# Altium PCB IBC_prijamnik_VB_ver2.PcbDoc (part 1 of 2)
Units mm, origin at the board's own origin, x right, y up, seen from the top; angles counter-clockwise.
Board outline 47.7 x 49.61 mm, 4 copper layers (Top Layer, GND 1, GND 2, Bottom Layer), stack 1.562 mm thick; 81 components, 52 nets, 253 pads, 212 vias.
Unrouted connection lines stored in the file: 60.
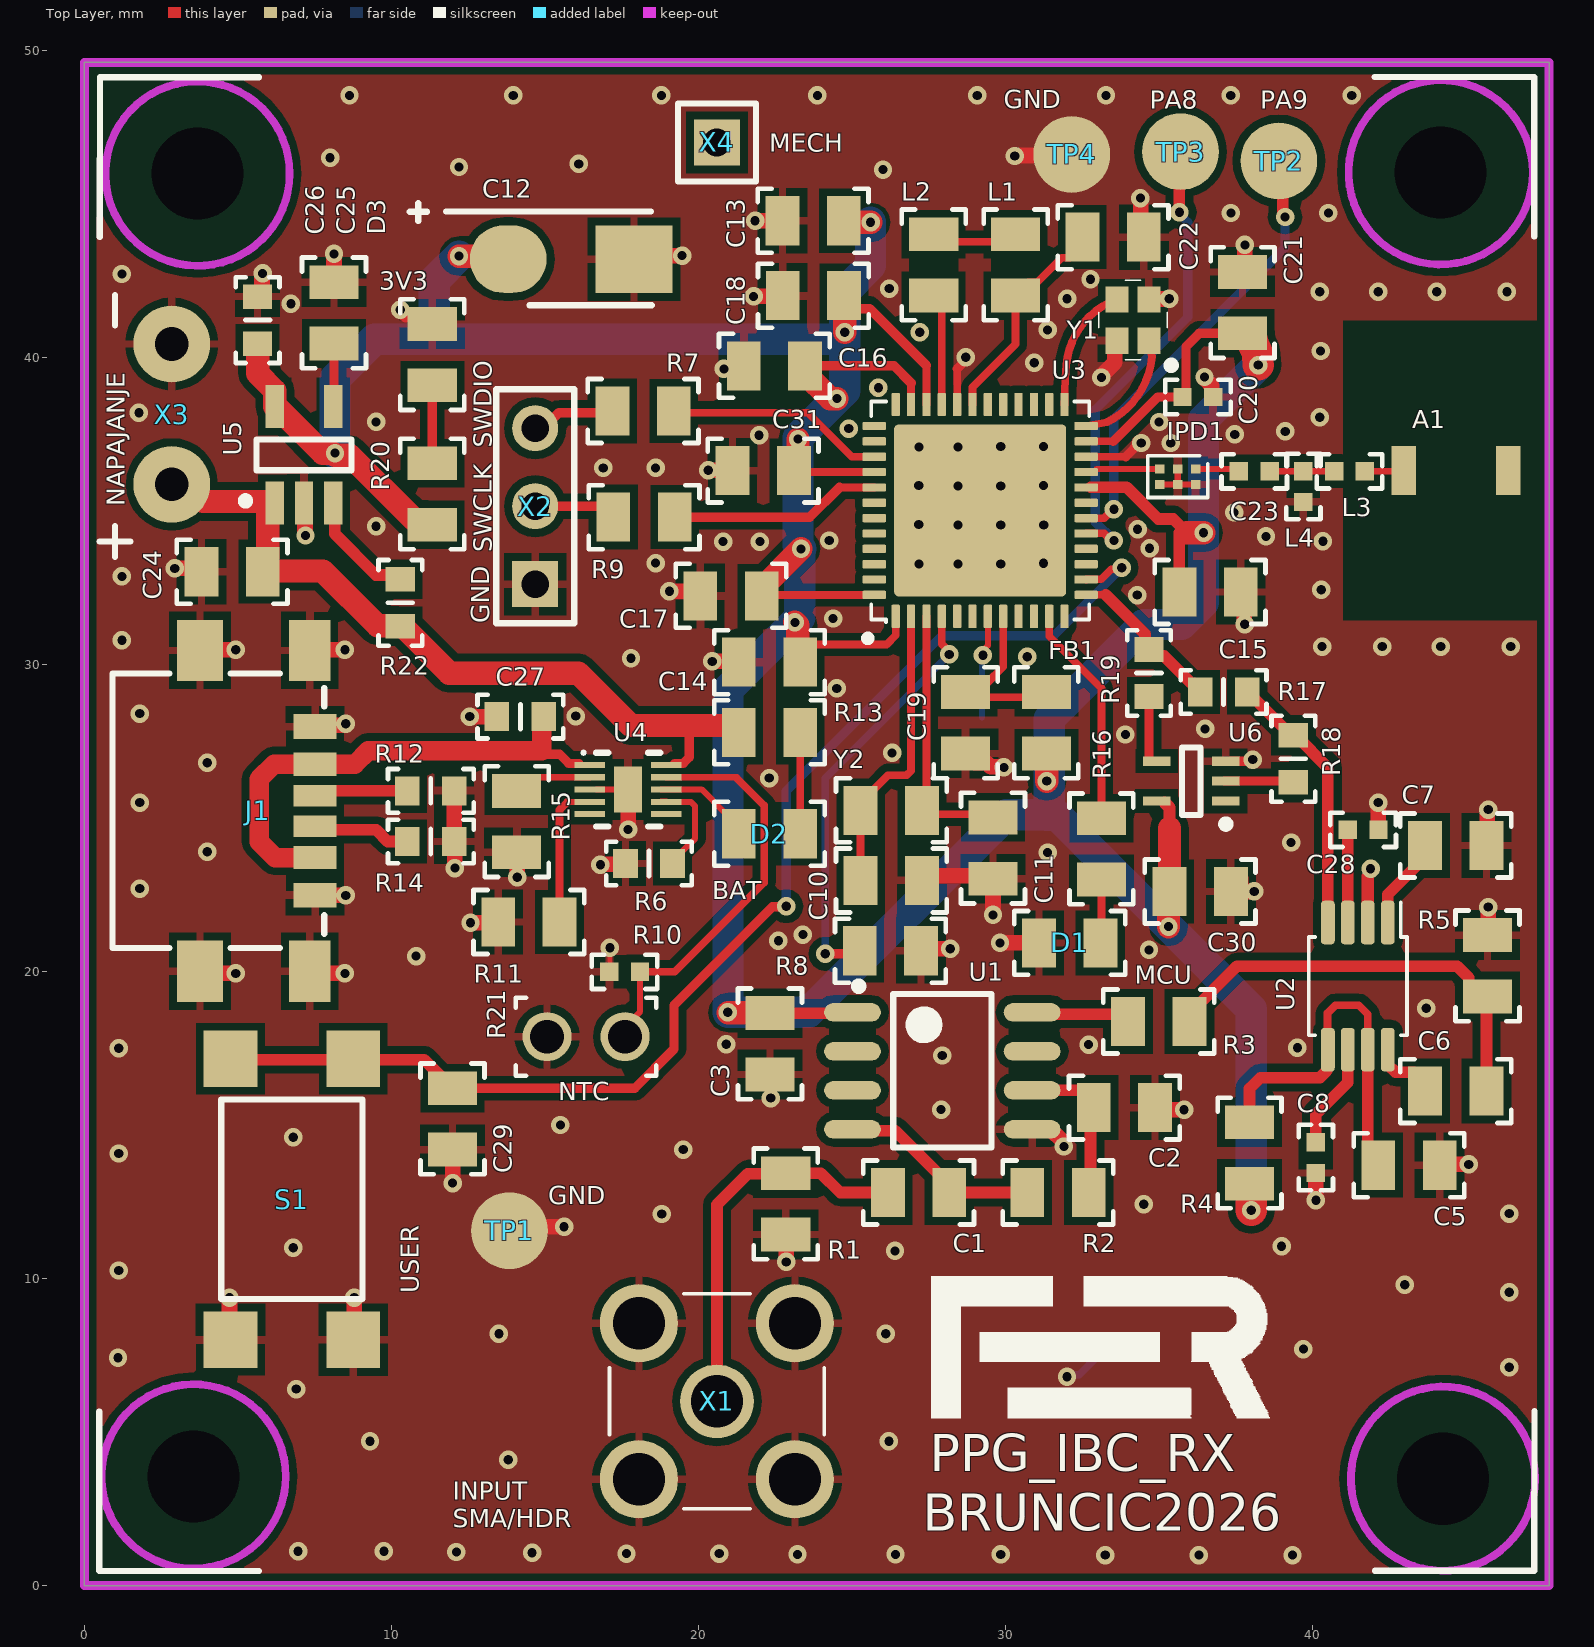
[diagram p0: Top Layer view]
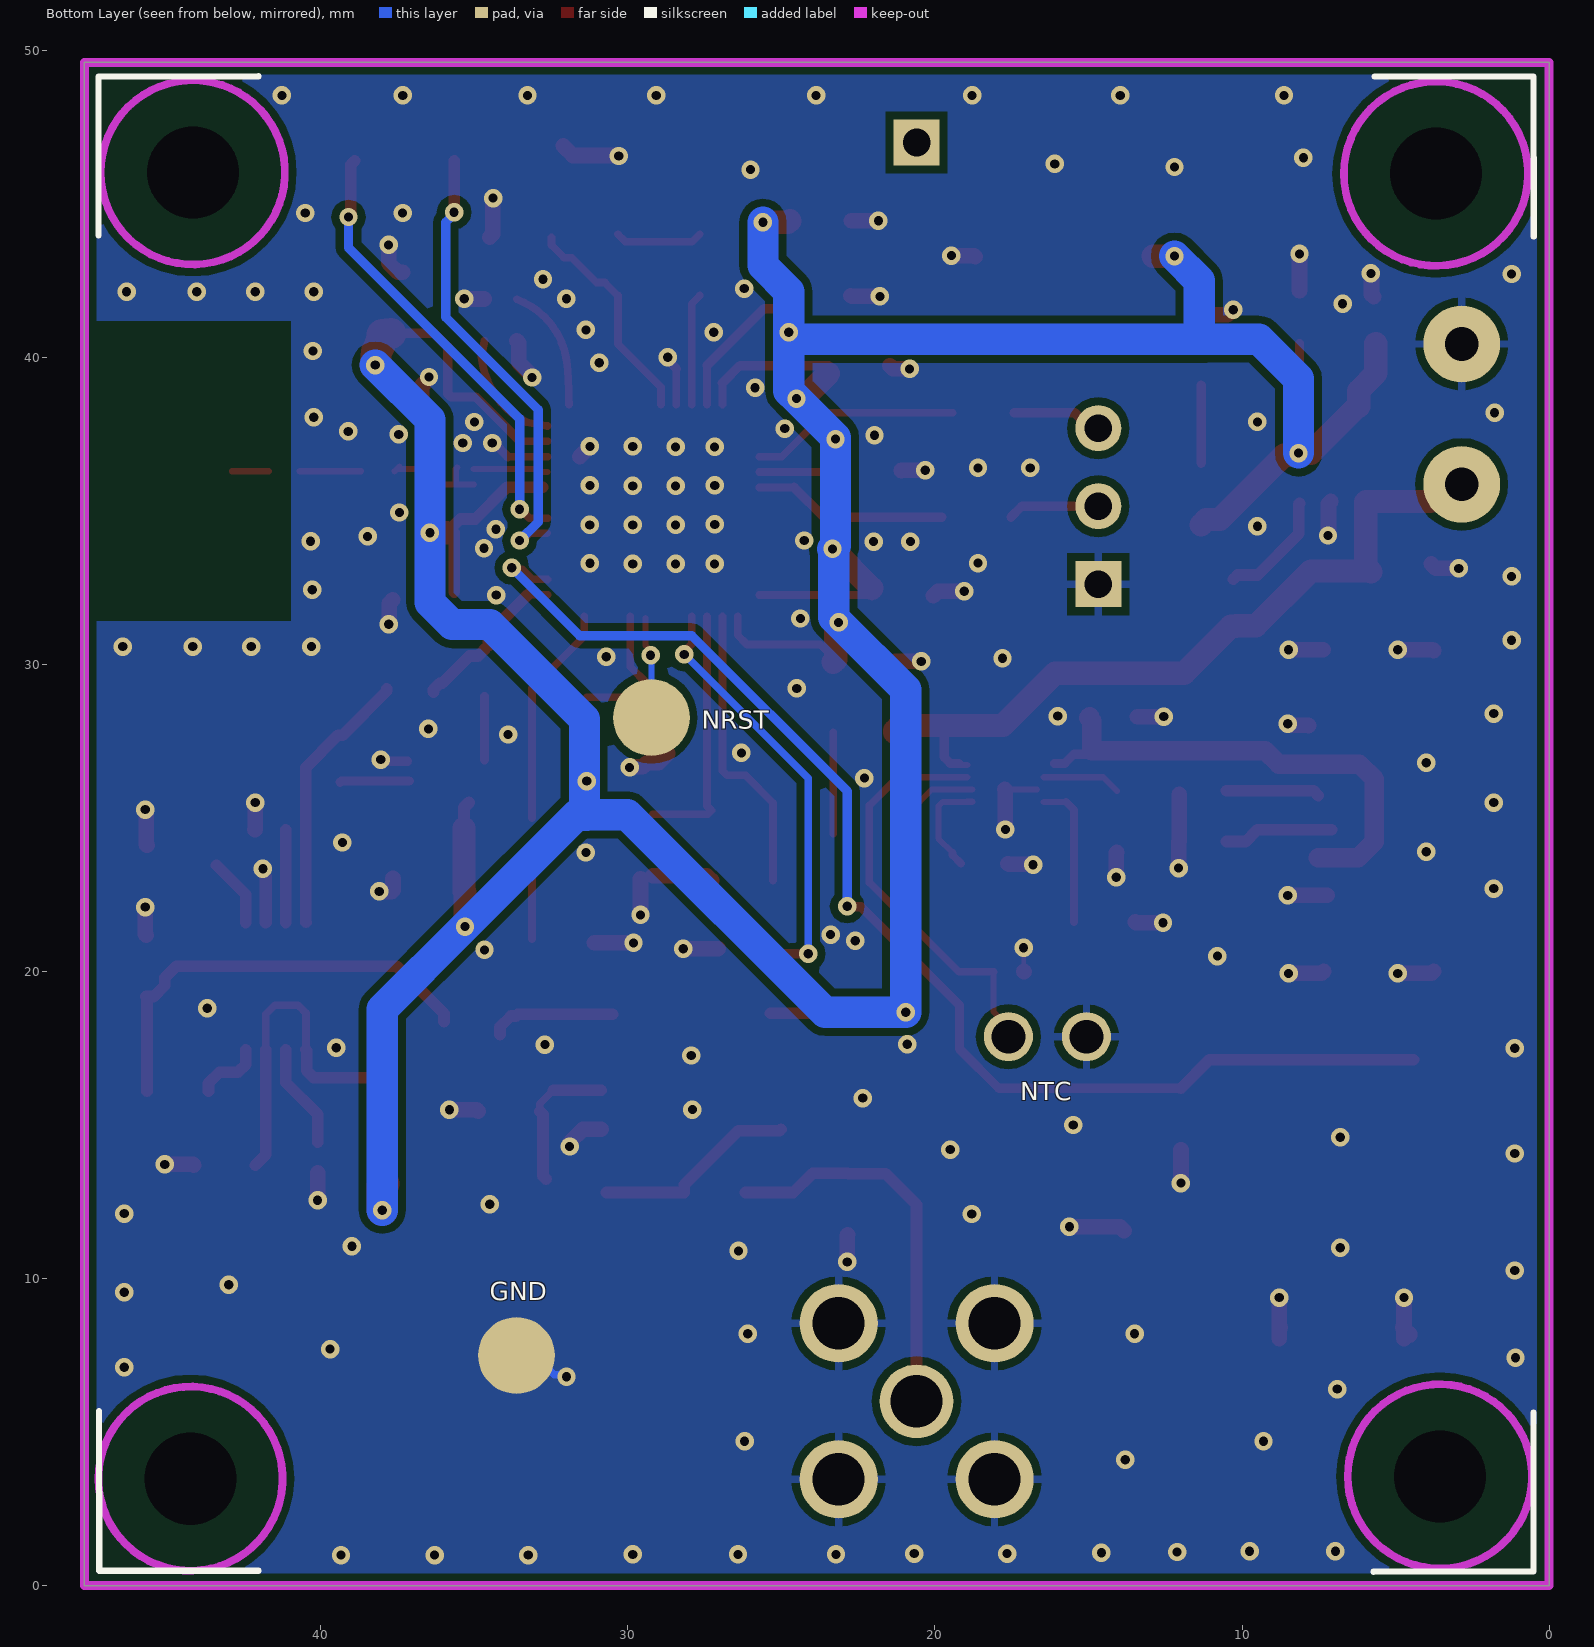
[diagram p1: Bottom Layer view, seen from below]
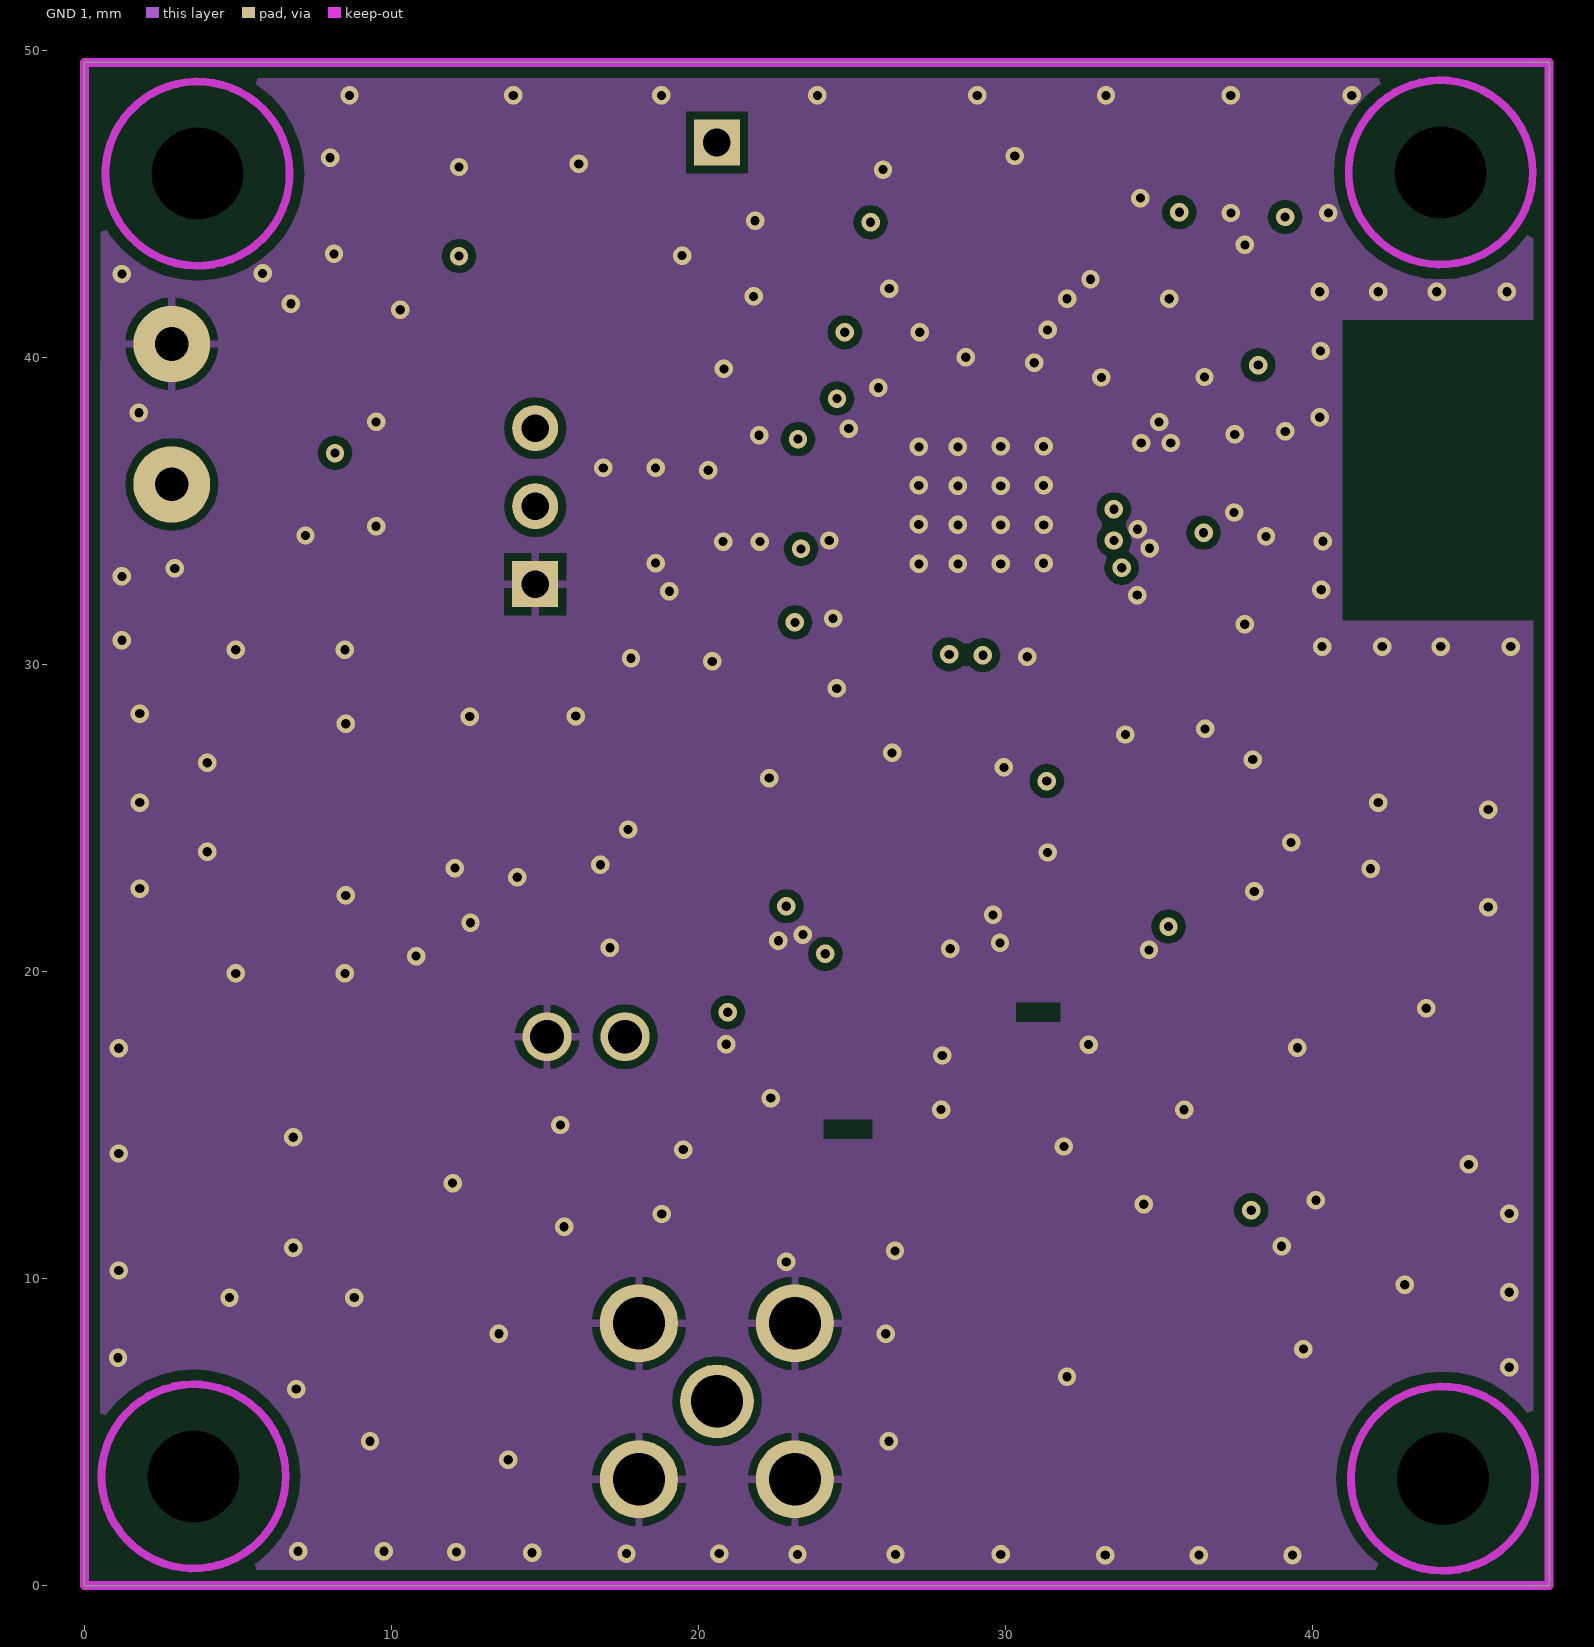
[diagram p2: GND 1]
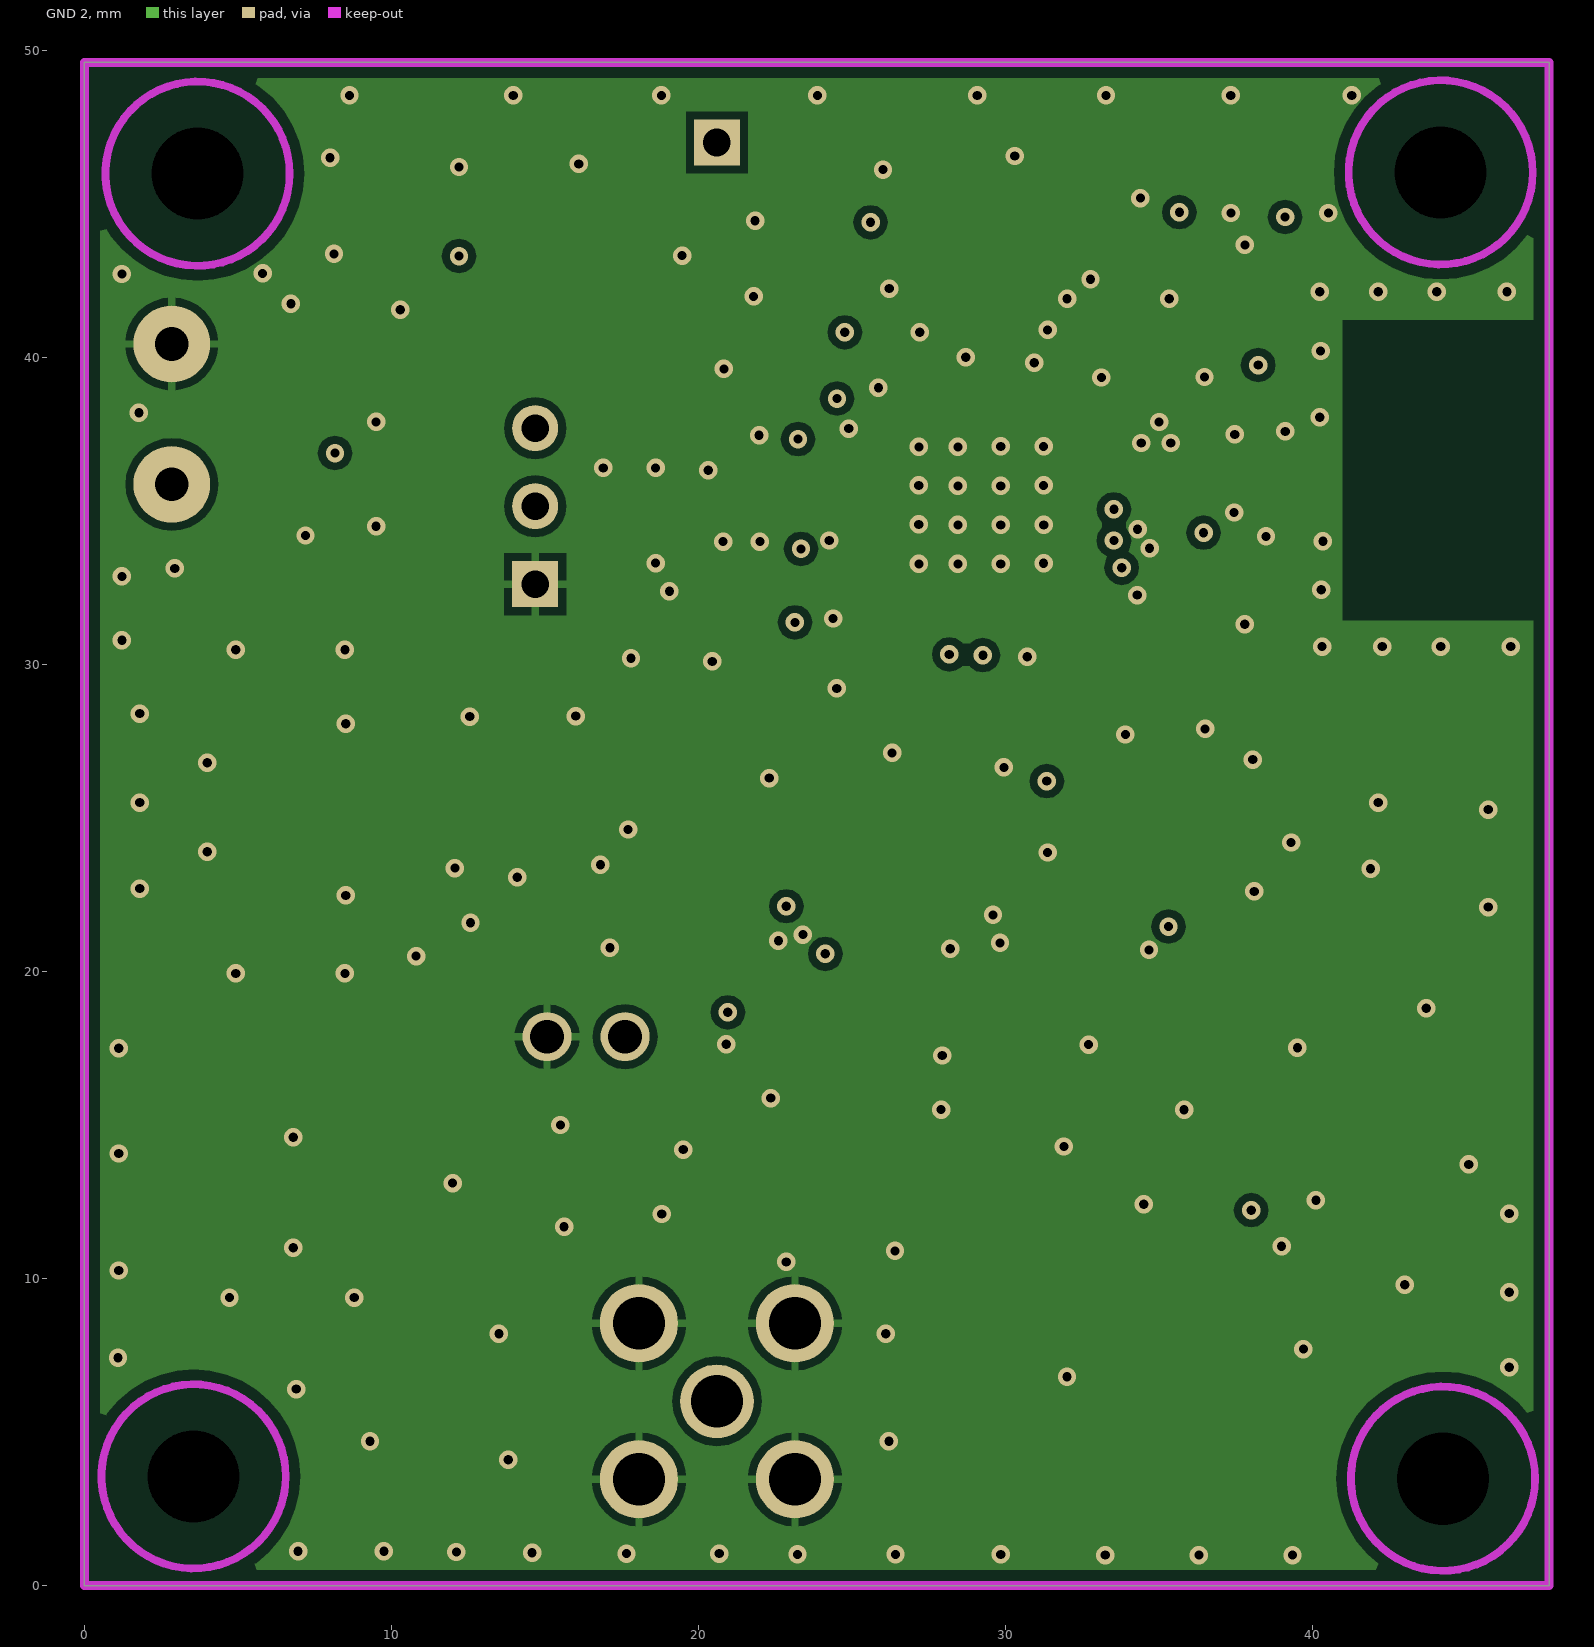
[diagram p3: GND 2]
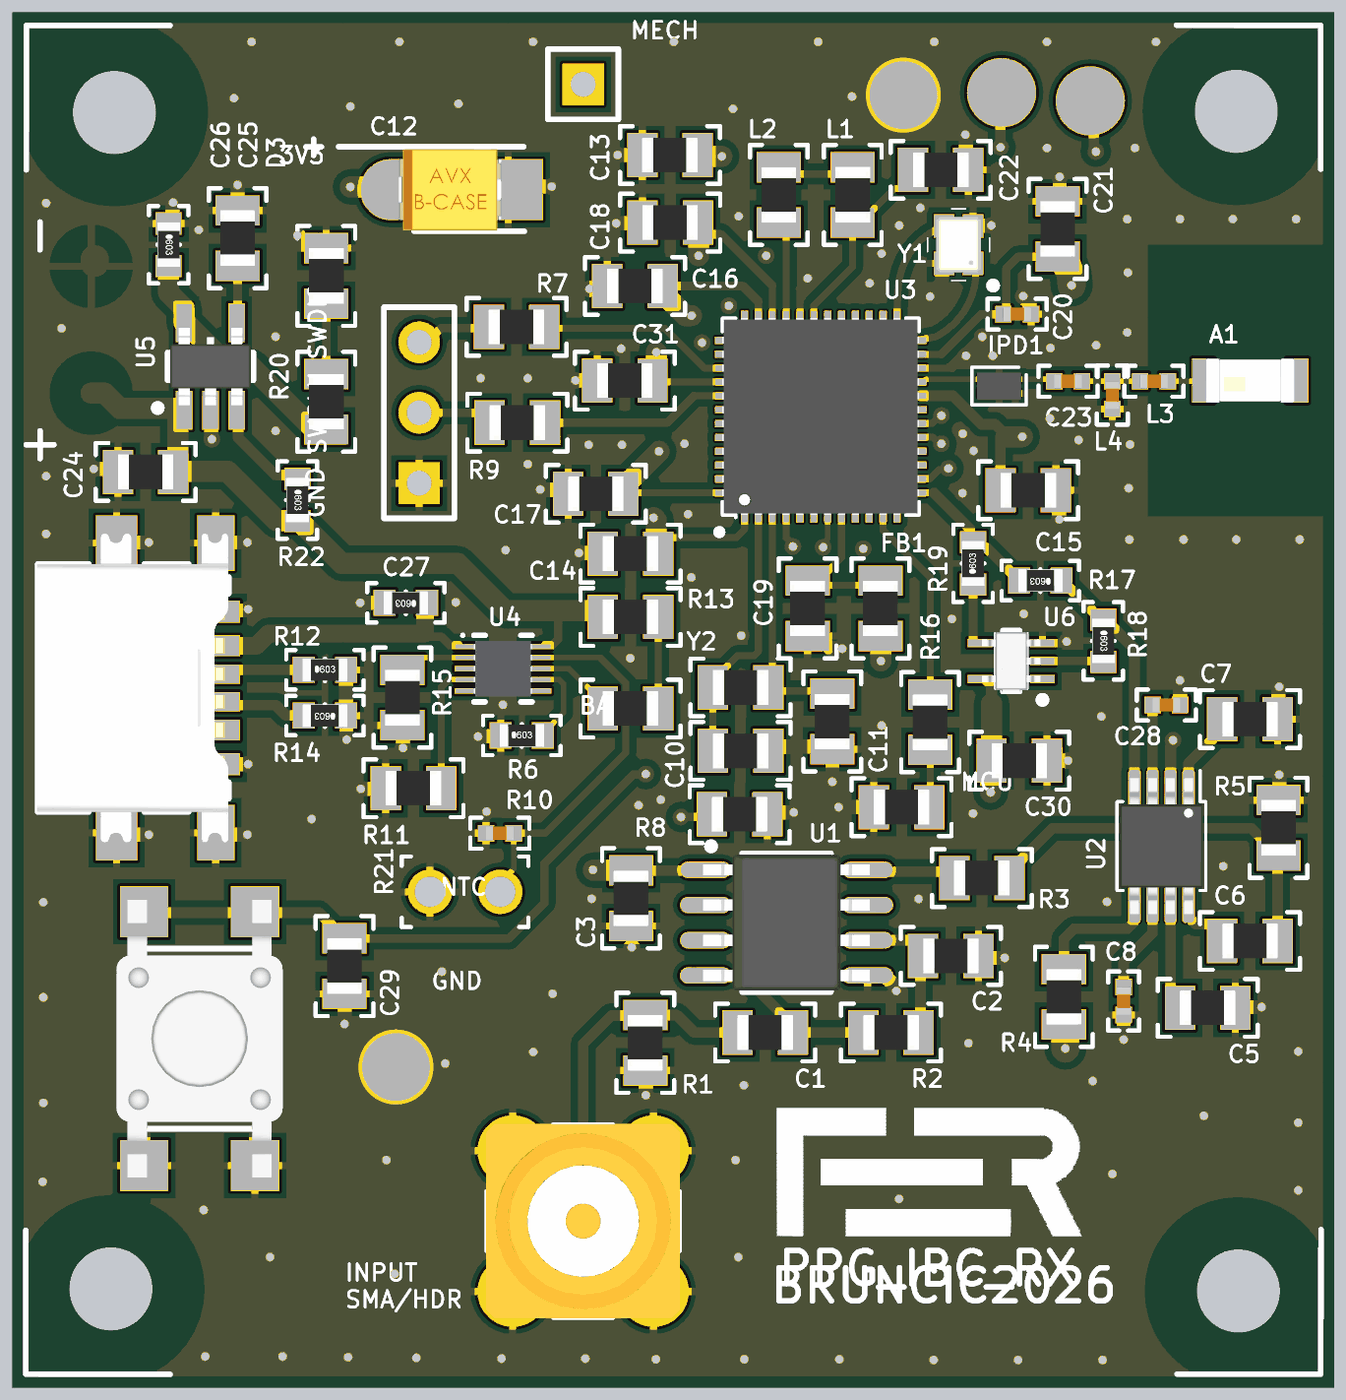
[diagram p4: 3D render of the assembled board from above, using the file's embedded part models]

## Layer stack, top to bottom
Top Solder: solder mask 0.019, SM-001, Dk 4
Top Layer: signal copper 0.035
Dielectric 2: prepreg 0.196, FR-4, Dk 4.74
GND 1: signal copper 0.035
Dielectric 1: dielectric 1.03, FR-4, Dk 4.74
GND 2: signal copper 0.035
Dielectric 3: prepreg 0.196, FR-4, Dk 4.74
Bottom Layer: signal copper 0.035
Bottom Solder: solder mask 0.019, SM-001, Dk 4

## Board outline
0,0 0,49.606 47.701,49.606 47.701,0

## Design rules (kind name [scope] priority, off if disabled: settings)
Clearance Clearance_InternalPlanes [InPoly and OnLayer('GND 1') or InPoly and OnLayer('GND 2') vs OnLayer('Keep-Out Layer')] p1: gap=0.35 ignorepadtopadclearanceinfootprint=TRUE
Clearance [All] p2: gap=0.152 ignorepadtopadclearanceinfootprint=FALSE except(0.15: Arc-Arc; 0.25: Arc-Poly Track-Poly SMDPad-Poly THPad-Poly Via-Poly Fill-Poly Poly-Poly)
HoleSize [All] p1: absolutevalues=TRUE maxlimit=3 minlimit=0.3 maxpercent=80.000 minpercent=20.000
HoleToHoleClearance [All] p1: gap=0.2 allowstackedmicrovias=TRUE
MinimumSolderMaskSliver [All] p1: minsoldermaskwidth=0.15
PasteMaskExpansion [All] p1: expansion=-0.025
PlaneClearance [All] p1: clearance=0.3
PlaneConnect Via_Connect [IsVia AND InNet('GND')] p1: planeconnectstyle=Direct reliefexpansion=0.508 reliefentries=4 reliefconductorwidth=0.254 reliefairgap=0.254
PolygonConnect PolygonConnect_RF [InComponent('IPD1') Or InComponent('L4')] p1: thpad.connectstyle=Relief thpad.reliefconductorwidth=0.254 thpad.reliefentries=2 thpad.polygonreliefangle="90 Angle" thpad.airgapwidth=0.254 smdpad.connectstyle=Relief smdpad.reliefconductorwidth=0.254 smdpad.reliefentries=4 smdpad.polygonreliefangle="90 Angle" smdpad.airgapwidth=0.254 via.connectstyle=Relief via.reliefconductorwidth=0.254 via.reliefentries=2 via.polygonreliefangle="90 Angle" via.airgapwidth=0.254
PolygonConnect PolygonConnect_Vias [IsVia] p2: connectstyle=Direct reliefconductorwidth=0.254 reliefentries=4 polygonreliefangle="90 Angle" airgapwidth=0.254
PolygonConnect PolygonConnect_Testpoints [HasFootprint('TST_POINT')] p3: connectstyle=Direct reliefconductorwidth=0.254 reliefentries=4 polygonreliefangle="90 Angle" airgapwidth=0.254
PolygonConnect PolygonConnect_Pads [All] p4: connectstyle=Relief reliefconductorwidth=0.254 reliefentries=4 polygonreliefangle="90 Angle" airgapwidth=0.254
RoutingVias [All] p1: holewidth=0.3 width=0.6 viastyle="Through Hole" minholewidth=0.1 minwidth=0.2 maxholewidth=1 maxwidth=2.5
SilkToSilkClearance [All] p1: silktosilkclearance=0.01
SilkToSolderMaskClearance [IsPad] p1: minsilkscreentomaskgap=0.1 clearancetoexposedcopper=TRUE
SolderMaskExpansion [All] p1: expansion=0.102 istentingtop=FALSE
SupplyNets "Schematic Supply Nets_1" [InNet('GND')] p1: voltage=0.000
SupplyNets "Schematic Supply Nets_3" [InNet('VBAT+')] p2: voltage=0.000
SupplyNets "Schematic Supply Nets_2" [InNet('VBUS')] p3: voltage=0.000
SupplyNets "Schematic Supply Nets" [InNet('3V3')] p4: voltage=0.000
Width [All] p1: maxlimit=1.5 minlimit=0.1 preferedwidth=0.15 checkconnectedcopper=TRUE
22 further rules are at their usual default settings.

## Classes and differential pairs
component class "STM32 MCU": C10 C11 C13 C14 C15 C16 C17 C18 C19 C20 C21 C22 C29 C30 C31 D1 FB1 GND L1 L2 NRST R7 R8 R9 R16 R17 R18 R19 S1 TP2 TP3 TP4 U3 Y1 Y2
component class "Logarithmic Amplifier": C5 C6 C7 C8 C28 R4 R5 U2
component class "IPD and BT Antena": A1 C23 IPD1 L3 L4
component class Buffer: C1 C2 C3 R1 R2 R3 U1 X1 X4
component class "Battery Charger and LDO Regulator": C24 C25 C26 C27 D2 D3 J1 J2 R6 R10 R11 R12 R13 R14 R15 R20 R21 R22 TP1 X3

## Components (designator, comment, footprint, x,y, rotation, side; value= is the part's Value field where it differs from the comment)
A1 "2450AT18B100E" ANT_2450AT18B100E 44.674,36.316 r0 top
C1 "100n" 0805 27.169,12.802 r0 top value=100nF
C2 "100n" 0805 33.869,15.566 r180 top value=100nF
C3 "100n" 0805 22.327,17.644 r90 top value=100nF
C5 "10n" 0805 43.139,13.691 r0 top value=10nF
C6 "100n" 0805 44.663,16.104 r180 top value=100nF
C7 "100n" 0805 44.663,24.105 r180 top value=100nF
C8 "22p" 0402 40.107,13.937 r270 top
C10 "15p" 0805 26.28,22.962 r180 top value=15pF
C11 "15p" 0805 29.591,24.019 r90 top value=15pF
C12 "10u/16V" 1210 15.8,43.2 r0 top
C13 "100n" 0805 23.733,44.45 r0 top value=100nF
C14 "100n" 0805 22.311,30.074 r0 top value=100nF
C15 "100n" 0805 36.662,32.36 r180 top value=100nF
C16 "100n" 0805 22.47,39.726 r0 top value=100nF
C17 "100n" 0805 21.057,32.233 r0 top value=100nF
C18 "4u7" 0805 23.74,42.012 r0 top value=4u7F
C19 "100n" 0805 28.7,28.1 r90 top value=100nF
C20 "100p" 0402 36.263,38.71 r180 top
C21 "100n" 0805 37.719,41.783 r270 top value=100nF
C22 "4u7" 0805 33.503,43.917 r180 top value=4u7F
C23 "1p2" 0402 38.099,36.291 r0 top value=1.2pF
C24 "100n" 0805 4.81,33.02 r0 top value=100nF
C25 "10n" 0805 8.128,41.451 r270 top value=10nF
C26 "1u" 0603 5.639,41.216 r270 top value=1µF
C27 "1u" 0603 14.2,28.3 r180 top value=1µF
C28 "22p" 0402 41.647,24.613 r180 top
C29 "100n" 0805 11.989,15.199 r90 top value=100nF
C30 "100n" 0805 36.338,22.606 r180 top value=100nF
C31 "100n" 0805 22.105,36.313 r0 top value=100nF
D1 "Zelena" 0805 32.09,20.93 r0 top
D2 "Zelena" 0805 22.311,24.486 r0 top
D3 "Zelena" 0805 11.328,40.091 r270 top
FB1 "MPZ2012S601AT000" 0805 31.328,28.1 r90 top
GND "TEST_POINT" TST_POINT 33.63,7.493 r90 bottom (schematic designator TP6)
IPD1 "MLPF-WB55-01E3" IPD 35.608,36.115 r180 top
J1 "USB4135-GF-A" USB4135GFA 4.361,25.23 r270 top
L1 "10u" 0805 30.328,43.012 r270 top value=10uH
L2 "10n" 0805 27.661,43.012 r90 top value=10nH
L3 "3n3" 0402 41.199,36.291 r0 top value=3.3nH
L4 "2n7" 0402 39.699,35.791 r270 top value=2.7nH
NRST "TEST_POINT" TST_POINT 29.235,28.27 r270 bottom (schematic designator TP5)
R1 "49R9" 0805 22.84,12.431 r90 top value=49,9
R2 "2k" 0805 31.709,12.802 r180 top
R3 "49R9" 0805 34.989,18.371 r0 top value=49,9
R4 "4R7" 0805 37.948,14.088 r270 top value=4.7
R5 "52R3" 0805 45.695,20.184 r270 top value=52.3
R6 "0R0" 0603 18.387,23.515 r0 top
R7 "49R9" 0805 18.196,38.252 r0 top value=49,9
R8 "10k" 0805 26.248,20.676 r0 top
R9 "49R9" 0805 18.226,34.798 r0 top value=49,9
R10 "10k" 0402 17.594,19.99 r0 top
R11 "2k" 0805 14.474,21.61 r0 top
R12 "5k1" 0603 11.281,25.883 r0 top value=5.1kΩ
R13 "1k5" 0805 22.311,27.788 r0 top
R14 "5k1" 0603 11.281,24.232 r180 top value=5.1kΩ
R15 "2k2" 0805 14.077,24.882 r90 top value=2.2kΩ
R16 "1k5" 0805 33.122,23.994 r90 top
R17 "0R0" 0603 37.1,29.1 r180 top
R18 "0R0" 0603 39.37,26.927 r270 top
R19 "0R0" 0603 34.671,29.721 r90 top
R20 "1k5" 0805 11.328,35.551 r270 top
R21 "10k" "TH NTC" 15.068,17.876 r90 top
R22 "0R0" 0603 10.287,32.007 r270 top
S1 "TL3301AF160QG" SOP400P1000X525-4N 6.756,12.579 r90 top
TP1 "TEST_POINT" TST_POINT 13.843,11.557 r0 top
TP2 "TEST_POINT" TST_POINT 38.9,46.4 r0 top
TP3 "TEST_POINT" TST_POINT 35.7,46.7 r0 top
TP4 "TEST_POINT" TST_POINT 32.156,46.609 r0 top
U1 "BUF602" SOIC-8 27.94,16.764 r0 top
U2 "AD8310ARMZ-REEL7" MSOP 41.472,19.524 r180 top
U3 "STM32WB55CGU6" STM32 29.224,35.041 r0 top
U4 "BQ24040DSQR" WSON-10 16.46,26.725 r0 top
U5 "TPS73633DBVR" SOT23 7.15,36.825 r90 top
U6 "74AHC1G17GWH" SOT353-1 36.05,26.2 r180 top
X1 "60312002114503" SMA 20.599,6 r0 top
X2 "PROGRAMIRANJE" HDR1X3 14.681,32.614 r90 top
X3 "BATERIJA" BATTERY 60.249,-86.817 r270 top
X4 "Header 1" HDR1X2 20.599,47 r270 top
Y1 "NX2016SA-32MHz" NX2016_4P 34.149,41.216 r90 top
Y2 "NX2012SA-32.768kHz" 0805 26.28,25.248 r180 top

## Footprints (in the part's own frame and the unit in brackets; to place one, negate y for a bottom-side part, rotate by r counter-clockwise, add the part's x,y. Pads: shape width x height; smd on the part's side, far side on the other; paste and mask are expansions set on the pad)
0402 [mm]
  rect 0.6x0.6 smd: 1(-0.5,0) 2(0.5,0)
  silkscreen extent -1.07,-0.56 1.07,0.56, body extent -0.5,-0.25 0.5,0.25, height 0.48
0603 [mm]
  rect 0.8x0.95 smd: 1(-0.765,0) 2(0.765,0)
  silkscreen extent -1.4,-0.71 1.4,0.71, body extent -0.8,-0.41 0.8,0.41, height 0.45
0805 [mm]
  rect 1.1x1.6 smd: 1(-1,0) 2(1,0)
  silkscreen extent -1.8,-1.04 1.8,1.04, body extent -1,-0.62 1,0.63, height 0.6
1210 [mm]
  oval 2.5x2.2 smd: 1(-2,0)
  rect 2.5x2.2 smd: 2(2.1,0)
  silkscreen extent -5.21,-1.5 2.68,1.82, body extent -1.85,-1.47 1.85,1.47
ANT_2450AT18B100E [mm]
  rect 0.8x1.6 smd: 1(-1.7,0) 2(1.7,0)
  body extent -1.6,-0.8 1.6,0.8, height 1.41
BATTERY [mm]
  round 2.5 hole 1.1: 1(-127.254,-57.404) 2(-122.682,-57.404)
HDR1X2 [mm] "Connector; Header; 2 Position"
  rect 1.5x1.5 hole 0.9: 1(0,0)
  silkscreen extent -1.27,-1.27 1.27,1.27
HDR1X3 [mm] "Connector; Header; 3 Position"
  rect 1.5x1.5 hole 0.9: 1(0,0)
  round 1.5 hole 0.9: 2(2.54,0) 3(5.08,0)
  silkscreen extent -1.27,-1.27 6.35,1.27
IPD [mm]
  rect 0.3x0.3 smd paste-0.05: A1(-0.587,-0.25) A2(0,-0.25) A3(0.587,-0.25) B1(-0.587,0.25) B2(0,0.25) B3(0.587,0.25)
  silkscreen extent -0.98,-0.68 0.98,0.68, body extent -1.05,-0.75 1.05,0.75, height 0.41
MSOP [mm]
  rrect50% 0.45x1.42 smd mask+0.06: 1(-0.975,-2.07) 2(-0.325,-2.07) 3(0.325,-2.07) 4(0.975,-2.07) 5(0.975,2.07) 6(0.325,2.07) 7(-0.325,2.07) 8(-0.975,2.07)
  silkscreen extent -1.6,-2.72 1.6,1.6, body extent -1.8,-2.98 1.8,2.98, height 1.1
NX2016_4P [mm]
  rect 0.85x0.75 smd mask+0.05: 1(-0.675,-0.525) 2(0.675,-0.525) 3(0.675,0.525) 4(-0.675,0.525)
  silkscreen extent -1.6,-1.37 1.3,1.12, body extent -1,-0.8 1,0.8, height 0.7
SMA [mm]
  round 2.4 hole 1.7 paste-2539.97: 1(0,0)
  round 2.55 hole 1.7 paste-2539.97: 2(-2.54,2.54) 3(2.54,2.54) 4(-2.54,-2.54) 5(2.54,-2.54)
  silkscreen extent -3.5,-3.5 3.5,3.5, body extent -4.06,-4.06 4.06,4.06, height 9.56
SOIC-8 [mm]
  oval 1.85x0.6 smd: 1(-2.925,1.905) 2(-2.925,0.635) 3(-2.925,-0.635) 4(-2.925,-1.905) 5(2.925,-1.905) 6(2.925,-0.635) 7(2.925,0.635) 8(2.925,1.905)
  silkscreen extent -2.85,-2.5 1.6,2.88, body extent -3.01,-2.5 3.01,2.5, height 1.75
SOP400P1000X525-4N [mm]
  rect 1.85x1.75 smd: 1(-4.575,2) 2(-4.575,-2) 3(4.575,-2) 4(4.575,2)
  silkscreen extent -3.25,-2.3 3.25,2.3, body extent -5,-3 5,3, height 5.12
SOT23 [mm]
  rect 1.4x0.6 smd: 1(-1.575,0.95) 2(-1.575,0) 3(-1.575,-0.95) 4(1.575,-0.95) 5(1.575,0.95)
  silkscreen extent -1.62,-1.55 0.5,2.03, body extent -1.4,-1.45 1.4,1.45, height 1.2
SOT353-1 [mm]
  rect 0.9x0.3 smd: 1(-1.125,0.65) 2(-1.125,0) 3(-1.125,-0.65) 4(1.125,-0.65) 5(1.125,0.65)
  silkscreen extent -1.25,-1.1 0.3,1.52, body extent -1.05,-1.05 1.05,1.1, height 0.96
STM32 [mm]
  rrect25% 0.27x0.76 smd mask+0.07: 1(-2.801,-3.475) 2(-2.301,-3.475) 3(-1.801,-3.475) 4(-1.301,-3.475) 5(-0.801,-3.475) 6(-0.301,-3.475) 7(0.199,-3.475) 8(0.699,-3.475) 9(1.199,-3.475) 10(1.699,-3.475) 11(2.199,-3.475) 12(2.699,-3.475) 25(2.699,3.425) 26(2.199,3.425) 27(1.699,3.425) 28(1.199,3.425) 29(0.699,3.425) 30(0.199,3.425) 31(-0.301,3.425) 32(-0.801,3.425) 33(-1.301,3.425) 34(-1.801,3.425) 35(-2.301,3.425) 36(-2.801,3.425)
  rrect25% 0.76x0.27 smd mask+0.07: 13(3.399,-2.775) 14(3.399,-2.275) 15(3.399,-1.775) 16(3.399,-1.275) 17(3.399,-0.775) 18(3.399,-0.275) 19(3.399,0.225) 20(3.399,0.725) 21(3.399,1.225) 22(3.399,1.725) 23(3.399,2.225) 24(3.399,2.725) 37(-3.501,2.725) 38(-3.501,2.225) 39(-3.501,1.725) 40(-3.501,1.225) 41(-3.501,0.725) 42(-3.501,0.225) 43(-3.501,-0.275) 44(-3.501,-0.775) 45(-3.501,-1.275) 46(-3.501,-1.775) 47(-3.501,-2.275) 48(-3.501,-2.775)
  rrect5% 5.6x5.6 smd paste+0 mask+0.07: 49(-0.051,-0.025)
  silkscreen extent -3.8,-4.28 3.5,3.52, body extent -4.02,-3.99 3.91,3.94, height 0.6
"TH NTC" [mm] "TH-2, 3,7x2,54 mm"
  round 1.6 hole 1.1: 1(0,0) 4(0,-2.54)
  silkscreen extent -1.27,-3.56 1.27,1.02
TST_POINT [mm]
  round 2.5 smd: 1(0,0)
USB4135GFA [mm]
  rect 0.7x1.4 smd: A5(-0.5,3.155) B5(0.5,3.155)
  rect 0.76x1.4 smd: A9(1.52,3.155) B9(-1.52,3.155)
  rect 0.8x1.4 smd: A12(2.75,3.155) B12(-2.75,3.155)
  rect 2x1.35 smd: MP1(-5.225,2.98) MP2(5.225,2.98)
  rect 2x1.5 smd: MP3(-5.225,-0.6) MP4(5.225,-0.6)
  silkscreen extent -4.47,-3.45 4.47,3.45, body extent -5.57,-3.47 5.57,3.43, height 3.23
WSON-10 [mm]
  rect 1x0.2 smd: 1(0,0) 2(0,-0.4) 3(0,-0.8) 4(0,-1.2) 5(0,-1.6) 6(2.49,-1.6) 7(2.49,-1.2) 8(2.49,-0.8) 9(2.49,-0.4) 10(2.49,0)
  rect 0.9x1.5 smd: 11(1.245,-0.8)
  silkscreen extent -0.25,-2 2.29,0.45, body extent 0.19,-1.8 2.29,0.2, height 0.8

## Part data
A1: "Antena, 2.45GHz", Case/Package="SMD-2, 3,8x1,8mm", Manufacturer=Johanson, Supplier Part Number 1=609-2450AT18B100E, Category="RF Antennas", ComponentLink1Description=https://datasheet.ciiva.com/24025/antenna-2450at18b100-242422-24025839.pdf?src-supplier=Mouser, Manufacturer Part Number=2450AT18B100E, Supplier 1=Mouser
C1 C2 C3 C6 C7 C13 C14 C15 C16 C17 C19 C21 C24 C29 C30 C31: library part MCJCU21GBB7104KTPA01, "Kondenzator, X7R, 10%, 50VDC", Capacitance=100nF, Case/Package=0805, Manufacturer=TDK, Manufacturer Part Number=C2012X7R1H104K125AE, Supplier Part Number 1=963-MCJCU21GBB7104KT, Category="Ceramic Capacitors", ComponentLink1Description=https://datasheet.ciiva.com/29534/mlcc-commercial-soft-en-29534235.pdf?src-supplier=Digi-Key, Kučište=0805, Supplier 1=Mouser, Supplier 2=Mouser, Supplier Part Number 2=810-C2012X7R1H104KAE
C5 C25: library part C0805C103K5RECAUTO, "Kondenzator, C0G, 10%, 50VDC", Capacitance=10nF, Case/Package=0805, Manufacturer=KEMET, Supplier Part Number 1=80-C0805C103K5RECAUT, Category="Ceramic Capacitors", ComponentLink1Description=http://www.farnell.com/datasheets/2723804.pdf?src-supplier=Farnell, Kučište=0805, Manufacturer Part Number=C0805C103K5RECAUTO, Supplier 1=Mouser
C8 C28: library part KAM05ACG1H220FH, "Kondenzator, C0G, 1%, 50VDC", Case/Package=0402, Supplier Part Number 1=581-KAM05ACG1H220FH, Kučište=0402, Supplier 1=Mouser
C10 C11: library part 08052U150JAT2A, "Kondenzator, C0G, 10%, 160VDC", Capacitance=15pF, Case/Package=0805, Manufacturer=Murata, Manufacturer Part Number=GRM21A5C2D150JW01D, Supplier Part Number 1=81-GRM21A5C2D150JW1D, Category="Ceramic Capacitors", ComponentLink1Description=http://components.arrow.com/part/dataview/0323_07284744?src-supplier=Arrow+Europe, Kučište=0805, Supplier 1=Mouser, Supplier 2=Mouser, Supplier Part Number 2=581-08052U150J
C12: library part 581-THJB106K016SJN, "Elektrolitski kondenzator, Ta, 10%, 16V", Case/Package=1210, Supplier Part Number 1=478-13152-1-ND, Supplier 1=DigiKey
C18 C22: library part CGA4J1X7R1H475K125AC, "Kondenzator, C0G, 10%, 50VDC", Capacitance=4u7F, Case/Package=0805, Manufacturer=TDK, Supplier Part Number 1=810-CGA4J1X7R1H475K1, Category="Ceramic Capacitors", ComponentLink1Description=https://product.tdk.com/info/en/catalog/datasheets/mlcc_automotive_general_en.pdf?src-supplier=Digi-Key, Kučište=0805, Manufacturer Part Number=CGA4J1X7R1H475K125AC, Supplier 1=Mouser
C20: library part GCM1555C2A101GE02D, "Kondenzator, C0G, 2%, 100VDC", Case/Package=0402, Supplier Part Number 1=490-GCM1555C2A101GE02DTR-ND, Kučište=0402, Supplier 1=DigiKey
C23: library part 609-QSCF500Q1R2B1GV0, "Kondenzator, C0G, 10%, 50VDC", Capacitance=1.2pF, Case=0402, Manufacturer=Johanson, Manufacturer Part Number=500R07S1R2BV4T, Supplier Part Number 1=609-500R07S1R2BV4T, Case/Package=0402, Category="Ceramic Capacitors", ComponentLink1Description=https://datasheet.ciiva.com/1461/1731432-1461669.pdf?src-supplier=Element14, Supplier 1=Mouser, Supplier 2="Arrow Electronics", Supplier Part Number 2=500R07S1R2BV4T
C26 C27: library part C1608X7R1H105K080AB, "Kondenzator, X7R, 10%, 50VDC", Case/Package=0603, Dielectric Material=Ceramic, Manufacturer=TDK, Max Operating Temperature=125°C, Min Operating Temperature=-55°C, Supplier Part Number=445-C1608X7R1H105K080ABCT-ND, Voltage Rating (DC)=50V, Category="Ceramic Capacitors", ComponentLink1Description=https://datasheet.octopart.com:443/C1608X7R1H105K080AB-TDK-datasheet-175423548.pdf?src-supplier=IHS, ComponentLink1URL=https://datasheet.octopart.com:443/C1608X7R1H105K080AB-TDK-datasheet-175423548.pdf?src-supplier=IHS, Height=800µm, Kučište=0603, Length=1.6mm, Lifecycle Status=Production, Manufacturer Part Number=C1608X7R1H105K080AB, Mounting Technology="Surface Mount", Number of Terminals=2, Pricing="1=0.21, 10=0.121, 50=0.0866, 100=0.076, 500=0.05824, 1000=0.05277 (USD)", Stock=9450, Supplier=DigiKey, Width=800µm
D1 D2 D3: library part SM0805GCL, "Dioda, svjetleća, 1,9V", Case/Package=0805, Manufacturer=Bivar, Supplier Part Number 1=749-SM0805GCL, Category=LEDs, ComponentLink1Description=https://datasheet.ciiva.com/16487/sm0805gcl-16487554.pdf?src-supplier=Future+Electronics, Kučište=0805, Manufacturer Part Number=SM0805GCL, Supplier 1=Mouser
FB1: "Feritna perla, 600Ohm", Case/Package=0805, Manufacturer=TDK, Supplier Part Number 1=810-MPZ2012S601AT000, Category=Inductors, ComponentLink1Description=https://datasheet.ciiva.com/46634/beads-commercial-power-mpz-en-46634335.pdf?src-supplier=Digi-Key, Kučište=0805, Manufacturer Part Number=MPZ2012S601AT000, Supplier 1=Mouser
IPD1: "RF Filtar, 2.4-2.5GHz", Case/Package="SMD-6, 1,6x1 mm", Manufacturer=STMicroelectronics, Supplier Part Number 1=511-MLPF-WB55-01E3, Category="Integrated Passive Device", ComponentLink1Description=http://www.farnell.com/datasheets/2802556.pdf?src-supplier=Farnell, Manufacturer Part Number=MLPF-WB55-01E3, Supplier 1=Mouser
J1: "USB-C priključak", Case/Package="SMD-10, 11,14x6,78mm", Manufacturer_Name="GCT (GLOBAL CONNECTOR TECHNOLOGY)", Mouser Part Number=640-USB4135-GF-A, Supplier Part Number 1=3946920, Datasheet Link=https://ar.mouser.com/datasheet/2/837/usb4135-2930399.pdf, Geometry.Height=3.5mm, Manufacturer_Part_Number=USB4135-GF-A, Mouser Price/Stock=https://www.mouser.co.uk/ProductDetail/GCT/USB4135-GF-A?qs=Li%252BoUPsLEnt6HRo6RUvaXA%3D%3D, Supplier 1=Farnell
L1: library part LSQBA201212T100KR, "Zavojnica, neoklopljena, 500mADC,", Case/Package=0805, Manufacturer=Murata, Manufacturer Part Number=LQM21FN100M70L, Category="Fixed Inductors", ComponentLink1Description=https://datasheet.ciiva.com/18088/getdatasheetpartid-74214-18088963.pdf?src-supplier=Verical, Kučište=0805, Supplier 1=Avnet, Supplier 2=Mouser, Supplier Part Number 1=LQM21FN100M70L, Supplier Part Number 2=81-LQM21FN100M70L
L2: library part AIMC-0805-10NJ-T, "Zavojnica, neoklopljena, +/-5%, 300mADC", Case Code (Imperial)=0402, Case Code (Metric)=1005, Case/Package=0805, Manufacturer=Abracon, Max Operating Temperature=155°C, Min Operating Temperature=-55°C, Power Dissipation=62.5mW, Supplier Part Number=2692041, Supplier Part Number 1=815-AIMC-0805-10NJT, Temperature Coefficient=400ppm/°C, Voltage Rating=50V, Category="Fixed Inductors", ComponentLink1Description=https://datasheet.octopart.com:443/MCMR04X000-PTL-Multicomp-datasheet-10850617.pdf?src-supplier=IHS, ComponentLink1URL=https://datasheet.octopart.com:443/MCMR04X000-PTL-Multicomp-datasheet-10850617.pdf?src-supplier=IHS, ComponentLink2Description=https://datasheet.octopart.com:443/MCMR04X000-PTL-Multicomp-datasheet-99731353.pdf?src-supplier=Farnell, ComponentLink2URL=https://datasheet.octopart.com:443/MCMR04X000-PTL-Multicomp-datasheet-99731353.pdf?src-supplier=Farnell, ComponentLink3Description=https://datasheet.octopart.com:443/MCMR04X000-PTL-Multicomp-datasheet-15896274.pdf?src-supplier=Newark, ComponentLink3URL=https://datasheet.octopart.com:443/MCMR04X000-PTL-Multicomp-datasheet-15896274.pdf?src-supplier=Newark, Composition=Ceramic, Contact Plating=Tin, Kučište=0805, Lifecycle Status=Production, Manufacturer Part Number=AIMC-0805-10NJ-T, Mounting Technology="Surface Mount", Number of Terminals=2, Packaging="Cut Tape", Power Rating=62.5mW, Pricing="10000=0.0033, 50000=0.0029 (GBP)", REACH SVHC=No, RoHS=Compliant, Stock=490000, Supplier=Farnell, Supplier 1=Mouser, Voltage Rating (DC)=50V
L3: library part BSCH1005053N3SCS, "Zavojnica, neoklopljena, 400mADC", Case/Package=0402, Manufacturer=Johanson, Manufacturer Part Number=L-07C3N3SV6T, Supplier Part Number 1=609-L-07C3N3SV6T, Category="Fixed Inductors", Kučište=0402, Supplier 1=Mouser, Supplier 2=Farnell, Supplier Part Number 2=3773633
L4: library part LRC0402CS2N7GV001T, "RF zavojnica, neoklopljena, 300mADC", Case/Package=0402, Manufacturer=Johanson, Manufacturer Part Number=L-07C2N7SV6T, Supplier Part Number 1=609-L-07C2N7SV6T, Category="Fixed Inductors", ComponentLink1Description=https://datasheet.ciiva.com/1473/1168792-1473898.pdf?src-supplier=Element14, Kučište=0402, Supplier 1=Mouser, Supplier 2=DigiKey, Supplier Part Number 2=712-LRC0402CS2N7GV001TCT-ND
R1 R3 R7 R9: library part AC0805FR-0749R9L, "Otpornik, ±100ppm/C, 125mW", Case/Package=0805, Manufacturer=Yageo, Supplier Part Number 1=603-AC0805FR-0749R9L, Category="Chip SMD Resistors", ComponentLink1Description=http://www.yageo.com/NewPortal/yageodocoutput?fileName=/pdf/R-Chip/PYu-AC_51_RoHS_L_6.pdf&src-supplier=Digi-Key, Kučište=0805, Manufacturer Part Number=AC0805FR-0749R9L, Supplier 1=Mouser
R2 R11: library part RC0805FR-102KL, "Otpornik, 1%, 125mW", Case/Package=0805, Manufacturer=Yageo, Supplier Part Number 1=603-RC0805FR-102KL, Category=Resistors, Kučište=0805, Manufacturer Part Number=RC0805FR-102KL, Supplier 1=Mouser
R4: library part AC0805FR-074R7L, "Otpornik, 1%, 125mW", Case/Package=0805, Manufacturer=Yageo, Supplier Part Number 1=603-AC0805FR-074R7L, Category="Chip SMD Resistors", ComponentLink1Description=https://datasheet.ciiva.com/12577/pyu-ac-51-rohs-l-2-12577194.pdf?src-supplier=Mouser, Kučište=0805, Manufacturer Part Number=AC0805FR-074R7L, Supplier 1=Mouser
R5: library part RC0805FR-0752R3L, "Otpornik, 1%, 125mW", Case=0805, Manufacturer=Yageo, Supplier Part Number 1=603-RC0805FR-0752R3L, Case/Package=0805, Category="Chip SMD Resistors", Manufacturer Part Number=RC0805FR-0752R3L, Supplier 1=Mouser
R6: library part CRCW06030000Z0EA, "Otpornik, 1%, 100mW", Case/Package=0402, Supplier Part Number 1="MCMR04X000 PTL", Kučište=0402, Supplier 1=Farnell
R8: library part RC0805JR-0710KL, "Otpornik, 5%, 125mW", Case/Package=0805, Manufacturer=Yageo, Supplier Part Number 1=603-RC0805JR-0710KL, Category="Chip SMD Resistors", ComponentLink1Description=https://datasheet.ciiva.com/7983/444164-7983765.pdf?src-supplier=Element14, Kučište=0805, Manufacturer Part Number=RC0805JR-0710KL, Supplier 1=Mouser
R10: library part NTCG103JF103FT1, "NTC Termistor, 1%", Case/Package=0402, Supplier Part Number 1=NTCG103JF103FT1S, Kučište=0402, Supplier 1=Farnell
R12 R14: library part MCT06030C5101FPW00, "Otpornik, ±100ppm/C, 100mW", Case Code (Imperial)=0603, Case Code (Metric)=1608, Manufacturer="Yageo Group", Manufacturer Part Number=AC0603FR-075K1L, Max Operating Temperature=155°C, Max Power Dissipation=100mW, Min Operating Temperature=-55°C, Supplier Part Number=1978087, Temperature Coefficient=100ppm/°C, Tolerance=1%, Voltage Rating=75V, Case/Package=0603, Category="Chip SMD Resistors", China RoHS=Non-Compliant, ComponentLink1Description=https://datasheet.octopart.com:443/AC0603FR-075K1L-Yageo-datasheet-182189377.pdf?src-supplier=IHS, ComponentLink1URL=https://datasheet.octopart.com:443/AC0603FR-075K1L-Yageo-datasheet-182189377.pdf?src-supplier=IHS, ComponentLink2Description=https://datasheet.octopart.com:443/AC0603FR-075K1L-Yageo-datasheet-86786639.pdf?src-supplier=Upverter, ComponentLink2URL=https://datasheet.octopart.com:443/AC0603FR-075K1L-Yageo-datasheet-86786639.pdf?src-supplier=Upverter, ComponentLink3Description=https://datasheet.octopart.com:443/AC0603FR-075K1L-Yageo-datasheet-178509465.pdf?src-supplier=Newark, ComponentLink3URL=https://datasheet.octopart.com:443/AC0603FR-075K1L-Yageo-datasheet-178509465.pdf?src-supplier=Newark, ComponentLink4Description=https://datasheet.octopart.com:443/AC0603FR-075K1L-Yageo-datasheet-151884373.pdf?src-supplier=Future+Electronics, ComponentLink4URL=https://datasheet.octopart.com:443/AC0603FR-075K1L-Yageo-datasheet-151884373.pdf?src-supplier=Future+Electronics, ComponentLink5Description=https://datasheet.octopart.com:443/AC0603FR-075K1L-Yageo-datasheet-166720450.pdf?src-supplier=Future+Electronics, ComponentLink5URL=https://datasheet.octopart.com:443/AC0603FR-075K1L-Yageo-datasheet-166720450.pdf?src-supplier=Future+Electronics, ComponentLink6Description=https://datasheet.octopart.com:443/AC0603FR-075K1L-Yageo-datasheet-137699919.pdf?src-supplier=Future+Electronics, ComponentLink6URL=https://datasheet.octopart.com:443/AC0603FR-075K1L-Yageo-datasheet-137699919.pdf?src-supplier=Future+Electronics, ComponentLink7Description=https://datasheet.octopart.com:443/AC0603FR-075K1L-Yageo-datasheet-128679721.pdf?src-supplier=X-ON, ComponentLink7URL=https://datasheet.octopart.com:443/AC0603FR-075K1L-Yageo-datasheet-128679721.pdf?src-supplier=X-ON, ComponentLink8Description=https://datasheet.octopart.com/AC0603FR-075K1L-Yageo-datasheet-12512238.pdf, ComponentLink8URL=https://datasheet.octopart.com/AC0603FR-075K1L-Yageo-datasheet-12512238.pdf, ComponentLink9Description=https://datasheet.octopart.com:443/AC0603FR-075K1L-Yageo-Group-datasheet-190301926.pdf?src-supplier=element14+APAC, ComponentLink9URL=https://datasheet.octopart.com:443/AC0603FR-075K1L-Yageo-Group-datasheet-190301926.pdf?src-supplier=element14+APAC, ComponentLink10Description=http://sigma.octopart.com:80/conflict_mineral_statement/Yageo-company-3.pdf?src-supplier=Compliance+Statements, ComponentLink10URL=http://sigma.octopart.com:80/conflict_mineral_statement/Yageo-company-3.pdf?src-supplier=Compliance+Statements, ComponentLink11Description=http://sigma.octopart.com:80/rohs_statement/Yageo-company-2.pdf?src-supplier=Compliance+Statements, ComponentLink11URL=http://sigma.octopart.com:80/rohs_statement/Yageo-company-2.pdf?src-supplier=Compliance+Statements, Composition="Thick Film", Features="Automotive AEC-Q200, Moisture Resistant", Height=450µm, Kučište=0603, Length=1.6mm, Lifecycle Status=Production, Mounting Technology="Surface Mount", Number of Terminals=2, Number of Terminations=2, Packaging="Tape & Reel", Power Dissipation=100mW, Power Rating=100mW, Pricing="500=0.005, 2500=0.005, 5000=0.004, 7500=0.004, 10000=0.004 (GBP)", REACH SVHC=Yes, RoHS=Compliant, Schedule B="8533210045, 8533210045|8533210045|8533210045|8533210045|8533210045|8533210045|8533210045|8533210045|8533210045|8533210045|8533210045|8533210045|8533210045|8533210045|8533210045|8533210045|8533210045|8533210045|8533210045|8533210045|8533210045|8533210045|8533210045|85", Stock=3500, Supplier=RS, Supplier 1=RS, Supplier Part Number 1=1978087, Termination=SMD/SMT, Weight=2.012816mg, Width=800µm, Working Voltage=75V
R13 R16 R20: library part MCU08050C1501FP5, "Otpornik, ±50ppm/C, 100mW", Case/Package=0805, Supplier Part Number 1=MCU08050C1501FP500, ComponentLink5Description=https://datasheet.octopart.com:443/CRCW12061K50JNEA-Vishay-datasheet-21226360.pdf?src-supplier=Newark, ComponentLink5URL=https://datasheet.octopart.com:443/CRCW12061K50JNEA-Vishay-datasheet-21226360.pdf?src-supplier=Newark, ComponentLink8Description=https://datasheet.octopart.com:443/CRCW12061K50JNEA-Vishay-datasheet-24897302.pdf?src-supplier=Farnell, ComponentLink8URL=https://datasheet.octopart.com:443/CRCW12061K50JNEA-Vishay-datasheet-24897302.pdf?src-supplier=Farnell, ComponentLink9Description=https://datasheet.octopart.com:443/CRCW12061K50JNEA-Vishay-datasheet-62316122.pdf?src-supplier=Future+Electronics, ComponentLink9URL=https://datasheet.octopart.com:443/CRCW12061K50JNEA-Vishay-datasheet-62316122.pdf?src-supplier=Future+Electronics, ComponentLink10Description=https://datasheet.octopart.com:443/CRCW12061K50JNEA-Vishay-datasheet-5300368.pdf?src-supplier=Future+Electronics, ComponentLink10URL=https://datasheet.octopart.com:443/CRCW12061K50JNEA-Vishay-datasheet-5300368.pdf?src-supplier=Future+Electronics, ComponentLink11Description=https://datasheet.octopart.com:443/CRCW12061K50JNEA-Vishay-datasheet-137115460.pdf?src-supplier=X-ON, ComponentLink11URL=https://datasheet.octopart.com:443/CRCW12061K50JNEA-Vishay-datasheet-137115460.pdf?src-supplier=X-ON, ComponentLink12Description=https://datasheet.octopart.com:443/CRCW12061K50JNEA-Vishay-Dale-datasheet-47688880.pdf?src-supplier=RS+(Formerly+Allied+Electronics), ComponentLink12URL=https://datasheet.octopart.com:443/CRCW12061K50JNEA-Vishay-Dale-datasheet-47688880.pdf?src-supplier=RS+(Formerly+Allied+Electronics), ComponentLink13Description=https://datasheet.octopart.com:443/CRCW12061K50JNEA-Vishay-datasheet-12001583.pdf?src-supplier=RS+(Formerly+Allied+Electronics), ComponentLink13URL=https://datasheet.octopart.com:443/CRCW12061K50JNEA-Vishay-datasheet-12001583.pdf?src-supplier=RS+(Formerly+Allied+Electronics), ComponentLink14Description=https://datasheet.octopart.com:443/CRCW12061K50JNEA-Vishay-datasheet-5306405.pdf?src-supplier=RS+(Formerly+Allied+Electronics), ComponentLink14URL=https://datasheet.octopart.com:443/CRCW12061K50JNEA-Vishay-datasheet-5306405.pdf?src-supplier=RS+(Formerly+Allied+Electronics), ComponentLink15Description=https://datasheet.octopart.com:443/CRCW12061K50JNEA-Vishay-datasheet-11540273.pdf?src-supplier=Arrow+Electronics, ComponentLink15URL=https://datasheet.octopart.com:443/CRCW12061K50JNEA-Vishay-datasheet-11540273.pdf?src-supplier=Arrow+Electronics, ComponentLink16Description=https://datasheet.octopart.com:443/CRCW12061K50JNEA-Vishay-datasheet-8445837.pdf?src-supplier=element14, ComponentLink16URL=https://datasheet.octopart.com:443/CRCW12061K50JNEA-Vishay-datasheet-8445837.pdf?src-supplier=element14, ComponentLink17Description=https://datasheet.octopart.com:443/CRCW12061K50JNEA-Vishay-datasheet-5377184.pdf?src-supplier=Garrett, ComponentLink17URL=https://datasheet.octopart.com:443/CRCW12061K50JNEA-Vishay-datasheet-5377184.pdf?src-supplier=Garrett, ComponentLink18Description=https://datasheet.octopart.com:443/CRCW12061K50JNEA-Vishay-datasheet-148188.pdf?src-supplier=Garrett, ComponentLink18URL=https://datasheet.octopart.com:443/CRCW12061K50JNEA-Vishay-datasheet-148188.pdf?src-supplier=Garrett, ComponentLink19Description=https://datasheet.octopart.com:443/CRCW12061K50JNEA-Vishay-datasheet-41916.pdf?src-supplier=Garrett, ComponentLink19URL=https://datasheet.octopart.com:443/CRCW12061K50JNEA-Vishay-datasheet-41916.pdf?src-supplier=Garrett, ComponentLink20Description=http://sigma.octopart.com:80/rohs_statement/Vishay-company-15.pdf?src-supplier=Compliance+Statements, ComponentLink20URL=http://sigma.octopart.com:80/rohs_statement/Vishay-company-15.pdf?src-supplier=Compliance+Statements, Kučište=0805, Supplier 1=Farnell
R15: library part MCU08050C2201FP5, "Otpornik, ±100ppm/C, 125mW", Case Code (Imperial)=0805, Case Code (Metric)=2012, Manufacturer=Panasonic, Manufacturer Lifecycle Status=ACTIVE, Manufacturer Part Number=ERJ-PB6B2201V, Max Operating Temperature=155°C, Max Power Dissipation=250mW, Min Operating Temperature=-55°C, Supplier Part Number=4541375, Temperature Coefficient=50ppm/°C, Tolerance=0.1%, Voltage Rating (DC)=150V, Case/Package=0805, Category="Chip SMD Resistors", ComponentLink1Description=https://datasheet.octopart.com:443/ERJ-PB6B2201V-Panasonic-datasheet-82522998.pdf?src-supplier=Panasonic, ComponentLink1URL=https://datasheet.octopart.com:443/ERJ-PB6B2201V-Panasonic-datasheet-82522998.pdf?src-supplier=Panasonic, ComponentLink2Description=https://datasheet.octopart.com:443/ERJPB6B2201V-Panasonic-datasheet-176289525.pdf?src-supplier=TME, ComponentLink2URL=https://datasheet.octopart.com:443/ERJPB6B2201V-Panasonic-datasheet-176289525.pdf?src-supplier=TME, ComponentLink3Description=https://sigma.octopart.com:443/150570796/technical_drawing/Panasonic-ERJPB6B2201V.pdf?src-supplier=Panasonic+SCT, ComponentLink3URL=https://sigma.octopart.com:443/150570796/technical_drawing/Panasonic-ERJPB6B2201V.pdf?src-supplier=Panasonic+SCT, ComponentLink4Description=https://datasheet.octopart.com:443/ERJPB6B2201V-Panasonic-datasheet-177212511.pdf?src-supplier=Burklin+Elektronik, ComponentLink4URL=https://datasheet.octopart.com:443/ERJPB6B2201V-Panasonic-datasheet-177212511.pdf?src-supplier=Burklin+Elektronik, Composition="Thick Film", Country of Origin=Japan, Export Control Classification Number (ECCN) Code=EAR99, Features="Automotive AEC-Q200", Harmonized Tariff Schedule (HTS) Code=8533.21.00.30, Height=600µm, Height - Seated (Max)=711.2µm, Introduction Date=2016-02-25, Kučište=0805, Length=2mm, Lifecycle Status=Production, Mounting Technology="Surface Mount", Number of Terminals=2, Number of Terminations=2, Part Series="High Precision Thick Film Chip Resistors", Power Dissipation=250mW, Power Rating=250mW, Pricing="10=0.0861, 100=0.0757, 500=0.0585, 1000=0.0534, 2500=0.0478, 5000=0.0422 (GBP)", REACH SVHC=Yes, RoHS=Compliant, Schedule B="8533210045, 8533210045|8533210045|8533210045|8533210045|8533210045", Stock=4030, Supplier=Farnell, Supplier 1=Farnell, Supplier 2=Farnell, Supplier Part Number 1=4541375, Supplier Part Number 2=MCU08050C2201FP500, Width=1.25mm, Working Voltage=150V
R17 R18 R19 R22: library part CRCW06030000Z0EA, "Otpornik, 1%, 100mW", Case/Package=0603, Supplier Part Number 1="MCMR04X000 PTL", Kučište=0402, Supplier 1=Farnell
R21: library part 954-103AT-2, "NTC Termistor, 1%", Case/Package="TH-2, 3,7x2,54 mm", Supplier Part Number 1=4316-103AT-2-ND, Supplier 1=DigiKey
S1: "Taktilni prekidač", Case/Package="SMD-4, 6x6mm", Manufacturer=E-Switch, Supplier Part Number 1=612-TL3301AF1, Category="Tactile Switches", ComponentLink1Description=https://datasheet.ciiva.com/2900/p010516d-2900775.pdf?src-supplier=Digi-Key, Manufacturer Part Number=TL3301AF160QG, Supplier 1=Mouser
U1: "Integrirani Buffer", Case/Package=SOIC-8, Manufacturer="Texas Instruments", Manufacturer Part Number=BUF602ID, Supplier Part Number 1=595-BUF602ID, Category="Operational Amplifiers", Supplier 1=Mouser
U2: "Logaritamsko pojačalo", Case/Package=MSOP, Manufacturer="Analog Devices", Supplier Part Number 1=584-AD8310ARMZ-R7, Category="Amplifiers - Op Amps, Buffer, Instrumentation", ComponentLink1Description=https://datasheet.ciiva.com/15128/getdatasheetpartid-243611-15128567.pdf?src-supplier=Verical, Manufacturer Part Number=AD8310ARMZ-REEL7, Supplier 1=Mouser
U3: "STM32 Mikrokontroler, 1,7-3,6V", Case/Package=UFQFPN-48, Manufacturer=STMicroelectronics, Supplier Part Number 1=511-STM32WB55CGU6, Category=Microcontroller, ComponentLink1Description=http://www.farnell.com/datasheets/2792352.pdf?src-supplier=Farnell, Manufacturer Part Number=STM32WB55CGU6, Supplier 1=Mouser
U4: "Li-Ion baterija, 800mA", Case/Package=WSON-10, Manufacturer_Name="Texas Instruments", Mouser Part Number=595-BQ24040DSQR, Arrow Part Number=BQ24040DSQR, Arrow Price/Stock=https://www.arrow.com/en/products/bq24040dsqr/texas-instruments?utm_currency=USD&region=nac, Datasheet Link=http://www.ti.com/lit/gpn/bq24040, Height=0.8mm, Manufacturer_Part_Number=BQ24040DSQR, Mouser Price/Stock=https://www.mouser.co.uk/ProductDetail/Texas-Instruments/BQ24040DSQR?qs=c7TMWs5treTJYvOlVMq%252B%2Fw%3D%3D, Supplier 1="Arrow Electronics", Supplier Part Number 1=BQ24040DSQR
U5: "IC Regulator, 3,3V, 400mADC", Case/Package=SOT-23, Manufacturer="Texas Instruments", Supplier Part Number 1=595-TPS73633DBVR, Category="Voltage Regulators - Linear", ComponentLink1Description=https://datasheet.ciiva.com/41462/001015026-da-01-en-ic-reg-ldo-3-3v-0-tps73633dbvr-sot-5-tid-41462871.pdf?src-supplier=Conrad, Manufacturer Part Number=TPS73633DBVR, Supplier 1=Mouser
U6: "Integrirani Schmittov okidni sklop", Case/Package=SOT353-1, Kučište=0805, Supplier 1=Farnell, Supplier Part Number 1=74AHC1G17GWH
X1: "SMA priključak", Manufacturer="Wurth Electronics", Supplier Part Number 1=710-60312002114503, Category="SMA Connector", Manufacturer Part Number=60312002114503, Supplier 1=Mouser
X2: library part "Header 3", "Header, 3-Pin", LatestRevisionDate=17-Jul-2002, LatestRevisionNote="Re-released for DXP Platform.", Publisher="Altium Limited"
X3: library part "Header 2", "Header, 2-Pin", LatestRevisionDate=17-Jul-2002, LatestRevisionNote="Re-released for DXP Platform.", Publisher="Altium Limited"
X4: library part "Header 2", "Header, 1-Pin", LatestRevisionDate=17-Jul-2002, LatestRevisionNote="Re-released for DXP Platform.", Publisher="Altium Limited"
Y1: library part NX2012SA32768K1, "Kristalni oscilator 32KHz", Case/Package=0805, Manufacturer=NDK, Manufacturer Part Number=NX2016SA-32MHZ-EXS00A-CS10925, Supplier Part Number 1=644-1375-1-ND, Category=Crystal, Kučište=0805, Supplier 1=DigiKey, Supplier 2=Mouser, Supplier Part Number 2=344-NX2016SA32S06465
Y2: library part NX2012SA-32.768K-STD-MUB-1, "Kristalni oscilator, 32.768KHz", Case/Package=0805, Manufacturer=NDK, Manufacturer Part Number=NX2012SA-32.768KHZ-EXS00A-MU00626, Supplier Part Number 1=344-NX2012SA32768K1, Category=Crystal, Kučište=0805, Supplier 1=Mouser

## Free pads (board coordinates)
  round 0 hole 3 unplated: 0(3.556,3.556) 0(44.171,46.025) 0(44.247,3.48) tga(3.683,45.983)

## Via types
v1: diameter 0.6, hole 0.3, Top Layer to Bottom Layer, tented both sides, 212 vias

## Nets (pads, with @x,y where several pads share a name; then routed paths per layer and width w, separated by ;. In a path a pad name is that pad's centre, name@x,y a point inside that pad or via, vN(x,y) a via of type N, cw(c..) or ccw(c..) an arc to the next point about the centre after c; other vN are vias at no path point)
3V3: C3.2 C12.1 C13.2 C14.2 C15.2 C16.2 C17.2 C18.2 C20.2 C21.2 C26.2 C30.2 C31.2 FB1.1 R4.2 R20.2 U1.1 U3.1 U3.20 U3.23 U3.34 U3.35 U3.40 U3.48 U5.5 U6.5 | length 159.9
  Top Layer w0.25: C31.2@23.153,36.265 U3.40 ; U3.35 26.923,39.167 ; U3.34 27.423,39.735 ; U3.23 33.512,37.265
  Top Layer w0.254: C17.2 22.089,32.265 U3.48 ; C14.2 23.311,30.227 23.734,30.65 26.125,30.65 26.423,30.948 U3.1
  Top Layer w0.305: C17.2 C17.2@22.057,32.483 ; C31.2@23.153,36.265 C31.2 C31.2@23.292,36.5 ; C16.2@23.47,39.476 C16.2 26.364,39.726 26.923,39.167 ; C18.2@24.778,41.763 C18.2@25.044,41.497 ; C18.2@25.137,41.589 25.568,41.589 27.423,39.735 ; 33.512,37.265 34.957,38.71 C20.2 35.874,38.821 35.874,40.345 36.313,40.783 C21.2
  Top Layer w0.381: C3.2@22.314,18.656 C3.2 U1.1@25.356,18.644 ; U3.20@32.774,35.768 33.941,35.768 34.972,34.737 35.46,34.737 35.907,34.29 ; C15.2 35.662,34.294
  Top Layer w0.4: U6.5@35.175,25.5 35.338,25.337 35.338,24.662
  Top Layer w0.762: C26.2 5.639,39.479 6.2,38.917 U5.5 ; U5.5@6.225,38.425 7.766,36.884 8.093,36.884 8.16,36.817 8.633,36.817 10.73,34.72 11.159,34.72 R20.2 ; v1(12.2,43.3) C12.1@12.899,43.3 ; v1@20.968,18.656 C3.2@22.314,18.656 ; C17.2@22.057,32.483 v1(23.337,33.763) ; v1(23.139,31.369) 23.238,31.271 23.238,30.147 C14.2 ; C31.2@23.241,36.551 v1(23.241,37.338) ; C16.2@23.47,39.476 24.286,38.659 v1(24.511,38.659) ; C13.2@24.736,44.453 24.789,44.399 v1(25.603,44.399) ; C18.2 24.765,41.986 v1(24.765,40.818) ; v1(31.344,26.2) FB1.1@31.344,26.931 ; v1(35.306,21.463) 35.306,22.574 C30.2 35.338,24.662 ; 35.907,34.29 v1(36.449,34.29)
  Top Layer w1.016: C21.2 C21.2@38.011,40.741 ; R4.2 37.958,13.088 38,13.046 v1(38,12.225) ; C21.2@38.011,40.741 ccw(c39.027,40.773) 38.123,40.307 38.185,40.188 38.222,39.842 cw(c37.211,39.735) v1(38.227,39.751)
  Bottom Layer w1.016: v1(8.16,36.884) 8.16,39.301 9.45,40.592 11.128,40.592 ; v1(12.2,43.3) 11.394,42.494 11.394,40.858 11.128,40.592 ; v1(23.241,37.338) 23.241,33.858 v1(23.337,33.763) ; v1@23.241,37.389 v1(24.511,38.659) 24.765,38.913 v1(24.765,40.818) ; v1@23.297,33.763 23.297,31.527 v1(23.139,31.369) 20.955,29.185 v1(20.955,18.669) 23.583,18.669 30.02,25.107 31.326,25.107 ; v1(25.603,44.399) 25.603,42.988 24.765,42.15 v1(24.765,40.818) ; 31.344,25.089 31.68,25.089 v1(35.306,21.463) 38,18.769 v1(38,12.225) ; 31.42,25.349 31.42,28.22 34.498,31.298 35.732,31.298 36.449,32.015 v1(36.449,34.29) 36.449,37.973 v1(38.227,39.751) ; 11.128,40.592 11.125,40.589 24.536,40.589 v1(24.765,40.818)
BOOT0: R8.1 U3.4 | length 13.9
  Top Layer w0.254: U3.4 27.923,30.667 28.169,30.421 v1(28.169,30.328)
  Top Layer w0.305: v1(24.13,20.574) 25.146,20.574 R8.1
  Bottom Layer w0.254: v1(24.13,20.574) 24.13,26.289 v1(28.169,30.328)
GND: C2.1 C3.1 C5.2 C7.1 C8.2 C10.1 C11.1 C12.2 C13.1 C14.1 C15.1 C16.1 C17.1 C18.1 C19.1 C20.1 C21.1 C22.1 C24.1 C25.1 C26.1 C27.2 C28.1 C29.1 C30.1 C31.1 D1.1 D3.1 GND.1 IPD1.A2 IPD1.B1 IPD1.B2 IPD1.B3 J1.A12 J1.B12 J1.MP1 J1.MP2 J1.MP3 J1.MP4 L4.2 pad.tga R1.1 R5.1 R6.1 R8.2 R10.1 R11.1 R12.2 R14.1 R15.1 R21.1 S1.1 S1.2 TP1.1 TP4.1 U1.5 U2.2 U3.22 U3.32 U3.49 U4.3 U4.11 U5.2 U6.3 X1.2 X1.3 X1.4 X1.5 X2.1 X3.1 Y1.2 Y1.4 | length 68
  Top Layer w0.15: R10.1@17.104,20 v1@17.104,20.762
  Top Layer w0.2: U4.3@16.686,25.928 U4.11@17.731,25.928 ; IPD1.B3 IPD1.B1 ; IPD1.A2@35.558,36.415 IPD1.A2 IPD1.B2
  Top Layer w0.25: U3.32 28.423,39.632 ; U3.22 33.912,36.765
  Top Layer w0.3: U6.3 v1@38,26.85 ; v1@37.95,26.85 v1@38,26.9
  Top Layer w0.305: 28.423,39.632 v1@28.702,39.911 ; 33.912,36.765 v1@34.358,37.211
  Top Layer w0.4: U2.2 v1@41.8,23.1 ; v1(41.887,23.343) 41.887,23.313 v1@41.9,23.3
  Top Layer w0.508: v1(2.939,33.129) 3.697,33.129 C24.1@3.842,33.274 ; J1.MP4 3.828,19.937 v1(4.926,19.937) ; J1.MP3 3.784,30.478 v1(4.926,30.478) ; S1.1@4.547,8.153 4.547,8.195 4.756,8.404 S1.1@4.724,8.436 ; S1.1@4.724,8.036 v1(4.724,9.379) ; C26.1@5.716,41.981 5.783,42.048 5.783,42.719 v1(5.801,42.737) ; U5.2@7.104,35.306 7.182,35.228 7.182,34.218 v1(7.2,34.2) ; J1.A12@7.223,22.479 v1(8.509,22.479) ; J1.MP2 7.408,19.937 v1(8.482,19.937) ; J1.MP1@7.364,30.478 v1(8.482,30.478) ; J1.B12@7.836,28.011 7.851,28.025 8.467,28.025 v1(8.509,28.067) ; C25.1@8.128,42.165 v1(8.128,43.372) ; S1.2@8.756,8.404 S1.2@8.788,8.436 ; S1.2@8.788,8.036 v1(8.788,9.379) ; v1(10.287,41.552) 10.312,41.552 10.477,41.387 11.032,41.387 D3.1 ; v1(11.989,13.106) C29.1 ; R14.1@12.04,24.238 R12.2@12.04,25.776 ; R14.1 12.055,24.222 12.055,23.378 v1(12.065,23.368) ; v1@12.533,28.3 C27.2@13.416,28.3 ; v1(12.573,21.59) 13.454,21.59 R11.1 ; TP1.1 13.97,11.684 v1(15.621,11.684) ; R15.1 14.097,23.862 v1(14.097,23.068) ; v1(16.805,23.475) 16.823,23.493 17.6,23.493 R6.1 ; R10.1 R10.1@17.104,20 ; v1@17.104,20.762 v1(17.114,20.772) ; v1@17.687,24.607 v1(17.705,24.625) 17.705,25.902 U4.11@17.731,25.928 ; X1.4@17.944,3.345 X1.4 ; X1.2@18.033,8.525 X1.2@18.376,8.868 ; C12.2@18.694,43.282 18.727,43.314 v1(19.464,43.314) ; v1(19.05,32.385) 19.904,32.385 C17.1 ; v1(20.32,36.322) 21.097,36.322 C31.1 ; v1(20.447,30.099) 21.285,30.099 C14.1 ; v1(20.828,39.624) 21.368,39.624 C16.1 ; v1(21.793,41.986) 22.714,41.986 C18.1 ; v1(21.844,44.45) 22.729,44.45 22.731,44.448 C13.1 ; R1.1 22.86,11.411 v1(22.86,10.541) ; X1.5@23.1,3.378 X1.5@23.118,3.396 ; X1.3@23.133,8.534 X1.3@23.136,8.537 ; R8.2@27.057,20.739 v1(28.2,20.739) ; C10.1 27.439,23.121 C11.1@29.185,23.121 ; C19.1 28.996,26.804 29.371,26.804 29.513,26.662 29.929,26.662 v1(29.947,26.645) ; v1(29.591,21.844) C11.1 ; v1(29.82,20.93) D1.1 ; v1(30.302,46.558) 30.32,46.576 31.793,46.576 TP4.1@32.105,46.887 ; U1.5 31.465,14.859 31.882,14.442 31.882,14.318 v1(31.9,14.3) ; v1(31.239,37.102) U3.49@31.576,36.765 ; v1(33.122,39.345) 33.122,39.404 33.555,39.837 33.555,40.472 Y1.4 ; v1@34.358,37.211 v1(34.417,37.211) ; v1(34.392,45.187) 34.409,45.169 34.409,44.01 C22.1 ; Y1.2 34.683,41.9 35.322,41.9 v1(35.331,41.91) ; C2.1@34.869,15.441 34.922,15.494 v1(35.814,15.494) ; v1(36.479,39.36) 36.496,39.343 36.496,39.297 36.717,39.076 36.717,38.756 C20.1 ; C21.1@37.338,42.767 37.483,42.767 37.795,43.079 v1(37.795,43.663) ; C30.1@37.653,23.032 37.653,22.651 37.698,22.606 v1(38.1,22.606) ; C15.1@37.662,32.106 37.771,31.996 37.771,31.323 v1(37.789,31.306) ; v1(40.107,12.548) C8.2 ; v1(42.139,25.502) 42.143,25.498 42.143,24.617 C28.1 ; C5.2 44.164,13.716 v1(45.085,13.716) ; C7.1 45.691,24.133 45.691,25.244 v1(45.72,25.273) ; R5.1 45.72,21.209 v1(45.72,22.098)
  Top Layer w1.016: X3.1@2.972,40.564 X3.1@2.972,40.688
  Bottom Layer w0.254: v1(32,6.8) 32.066,6.866 32.395,6.866 33.022,7.493 GND.1
  other v1: 33.249,0.991 36.297,0.991 39.345,0.991 23.223,1.016 26.416,1.016 29.845,1.016 17.653,1.041 20.676,1.041 14.58,1.067 12.116,1.092 6.96,1.118 9.754,1.118 13.8,4.1 9.3,4.7 26.2,4.7 6.9,6.4 46.406,7.112 1.092,7.417 39.7,7.7 13.5,8.2 26.1,8.2 46.406,9.55 43,9.8 1.118,10.262 26.4,10.9 6.8,11 38.989,11.049 18.8,12.1 46.406,12.116 34.504,12.417 1.118,14.072 19.5,14.2 6.8,14.6 15.5,15 27.9,15.5 22.352,15.875 27.94,17.264 1.118,17.501 39.504,17.517 20.904,17.628 32.704,17.617 43.7,18.8 10.8,20.5 34.671,20.701 22.6,21 23.4,21.2 1.8,22.7 31.369,23.876 4,23.9 39.3,24.2 1.8,25.5 22.3,26.3 4,26.8 38.05,26.9 26.304,27.117 33.904,27.717 36.5,27.9 12.552,28.3 16.004,28.317 1.8,28.4 24.504,29.217 17.8,30.2 30.709,30.251 40.31,30.582 42.266,30.582 44.171,30.582 46.457,30.582 1.219,30.785 24.384,31.496 34.29,32.258 40.284,32.436 1.219,32.868 27.178,33.274 28.448,33.274 29.845,33.274 18.6,33.3 31.239,33.292 34.689,33.782 20.8,34 22,34 40.335,34.011 24.257,34.036 38.481,34.17 34.3,34.4 9.5,34.5 28.448,34.544 29.845,34.544 31.242,34.544 27.175,34.562 37.443,34.948 28.448,35.814 29.845,35.814 27.175,35.832 31.239,35.832 16.9,36.4 18.6,36.4 27.178,37.084 28.448,37.084 29.842,37.102 35.382,37.211 21.971,37.465 37.465,37.49 39.112,37.589 24.891,37.681 9.5,37.9 35.001,37.897 40.234,38.049 1.775,38.2 25.857,39.014 30.937,39.827 28.702,40.005 40.259,40.208 27.203,40.818 31.369,40.894 6.725,41.75 32.004,41.91 40.234,42.139 42.139,42.139 44.044,42.139 46.33,42.139 26.213,42.24 32.766,42.545 1.219,42.716 37.338,44.704 40.513,44.704 26.008,46.117 12.2,46.2 16.1,46.3 8,46.5 8.633,48.532 13.967,48.532 18.793,48.532 23.873,48.532 29.08,48.532 33.271,48.532 37.335,48.532 41.272,48.532
NetA1_1: A1.1 L3.2 | length 1.2
  Top Layer w0.2: L3.2 A1.1@42.899,36.291
NetC1_1: C1.1 R1.2 X1.1 | length 12.7
  Top Layer w0.381: X1.1 20.599,12.404 21.606,13.411 22.82,13.411 R1.2 23.983,13.431 24.613,12.802 C1.1
NetC1_2: C1.2 R2.2 U1.4 | length 6.7
  Top Layer w0.381: U1.4 25.057,14.817 26.403,14.817 28.169,13.052 C1.2 R2.2
NetC2_2: C2.2 R2.1 U1.6 | length 4.7
  Top Layer w0.254: C2.2@32.432,16.129 32.869,15.691 C2.2@32.869,15.441
  Top Layer w0.381: U1.6 C2.2@32.432,16.129 ; R2.1@32.669,13.241 32.769,13.341 32.769,15.341 C2.2@32.869,15.441
NetC5_1: C5.1 R4.1 U2.5 U2.7 | length 12.3
  Top Layer w0.254: U2.5@40.488,17.463 40.488,18.644 40.551,18.707 40.678,18.834 40.742,18.898 41.504,18.898 41.797,18.605 U2.7
  Top Layer w0.381: R4.1 37.948,16.188 38.304,16.544 40.239,16.544 40.462,16.767 40.462,17.419 U2.5 ; U2.7 41.797,14.033 C5.1
NetC6_1: C6.1 R3.2 R5.2 | length 14.2
  Top Layer w0.381: R3.2 35.989,18.621 37.536,20.168 44.711,20.168 45.085,19.793 45.085,19.543 45.445,19.184 R5.2 45.663,19.152 C6.1
NetC6_2: C6.2 U2.8 | length 2.2
  Top Layer w0.381: U2.8 42.447,16.969 42.702,16.713 43.303,16.713 43.663,16.354 C6.2
NetC7_2: C7.2 U2.1 | length 2.3
  Top Layer w0.381: U2.1@42.447,21.594 42.447,22.508 C7.2@43.4,23.461
NetC8_1: C8.1 U2.6 | length 3.4
  Top Layer w0.381: C8.1 40.107,15.344 41.147,16.384 U2.6
NetC10_2: C10.2 U3.2 Y2.2 | length 9.6
  Top Layer w0.254: C10.2 Y2.2 25.28,25.498 26.173,26.391 26.774,26.391 26.923,26.539 U3.2
NetC11_2: C11.2 U3.3 Y2.1 | length 8.3
  Top Layer w0.254: U3.3 27.423,25.391 Y2.1 27.407,25.121 C11.2@29.185,25.121
NetC19_2: C19.2 FB1.2 U3.8 | length 5.5
  Top Layer w0.254: C19.2@28.702,28.956 28.78,29.034 29.034,29.034 29.034,29.038 29.375,29.379 29.379,29.379 29.923,29.923 U3.8 ; C19.2@29.111,28.931 31.094,28.931 FB1.2@31.344,28.931
NetC22_2: C22.2 L1.2 U3.31 | length 7.2
  Top Layer w0.254: U3.31 28.923,39.03 30.328,40.434 L1.2 30.751,42.435 31.021,42.435 31.83,43.244 32.08,43.244 32.487,43.651 C22.2@32.487,43.901
NetC23_1: C23.1 IPD1.A1 | length 1.6
  Top Layer w0.2: IPD1.A1 C23.1@37.521,36.365 ; C23.1@37.44,36.449 C23.1
NetC23_2: C23.2 L3.1 L4.1 | length 2
  Top Layer w0.2: C23.2@38.699,36.291 L4.1 L3.1
NetC25_2: C25.2 U5.4 | length 1.9
  Top Layer w0.305: U5.4@8.128,38.591 C25.2
NetC28_2: C28.2 U2.3 | length 3
  Top Layer w0.381: U2.3 C28.2
NetC29_2: C29.2 S1.3 S1.4 U3.14 | length 41.1
  Top Layer w0.25: U3.14 32.633,32.775 33.112,32.775 33.442,33.105 v1@33.74,33.105
  Top Layer w0.305: C29.2 17.926,16.199 19.2,17.473 19.2,18.9 22.411,22.111 22.848,22.111 v1(22.86,22.123)
  Top Layer w0.381: S1.4@4.416,17.126 11.061,17.126 C29.2
  Bottom Layer w0.305: v1(22.86,22.123) 22.86,25.874 27.918,30.932 31.567,30.932 v1(33.782,33.147)
NetD1_2: D1.2 R16.1 | length 1.9
  Top Layer w0.254: D1.2@33.122,21.057 R16.1
NetD2_1: D2.1 U4.8 | length 3.3
  Top Layer w0.2: U4.8@18.776,25.928 20.097,25.928 20.839,25.186 20.861,25.186 21.311,24.736 D2.1
NetD2_2: D2.2 R13.2 | length 3.3
  Top Layer w0.254: D2.2 R13.2
NetD3_2: D3.2 R20.1 | length 2.5
  Top Layer w0.305: R20.1 D3.2
NetIPD1_A3: IPD1.A3 U3.21 | length 2.4
  Top Layer w0.2: U3.21 32.868,36.265 32.963,36.361 34.079,36.361 34.083,36.365 IPD1.A3
NetJ1_A5: J1.A5 R12.1 | length 3.1
  Top Layer w0.381: J1.A5 7.669,25.883 R12.1
NetJ1_B5: J1.B5 R14.2 | length 3.6
  Top Layer w0.381: J1.B5@7.077,24.613 9.5,24.613 9.881,24.232 R14.2
NetL1_1: L1.1 L2.2 | length 2.9
  Top Layer w0.254: L2.2 27.908,43.764 30.08,43.764 L1.1
NetL2_1: L2.1 U3.33 | length 3.7
  Top Layer w0.254: L2.1 27.923,41.749 U3.33
NetR3_1: R3.1 U1.8 | length 4.1
  Top Layer w0.381: U1.8@30.497,18.61 33.587,18.61 33.646,18.551 33.81,18.551 34.169,18.191 R3.1@34.169,17.941
NetR6_2: R6.2 U4.7 | length 3.3
  Top Layer w0.2: U4.7@18.776,25.528 U4.7@18.95,25.528 ; U4.7 19.75,25.525 19.887,25.388 19.887,24.329 R6.2@19.425,23.866
  Top Layer w0.254: R6.2 19.425,23.788 R6.2@19.425,23.866
NetR7_1: R7.1 X2.3 | length 3
  Top Layer w0.305: X2.3 14.949,37.694 15.457,38.202 R7.1@17.424,38.202
NetR9_1: R9.1 X2.2 | length 3
  Top Layer w0.305: X2.2 17.17,35.154 R9.1@17.526,34.798